# EAGLE board C-USG-CPU-10 (EAGLE 9.1.3), part 1 of 5
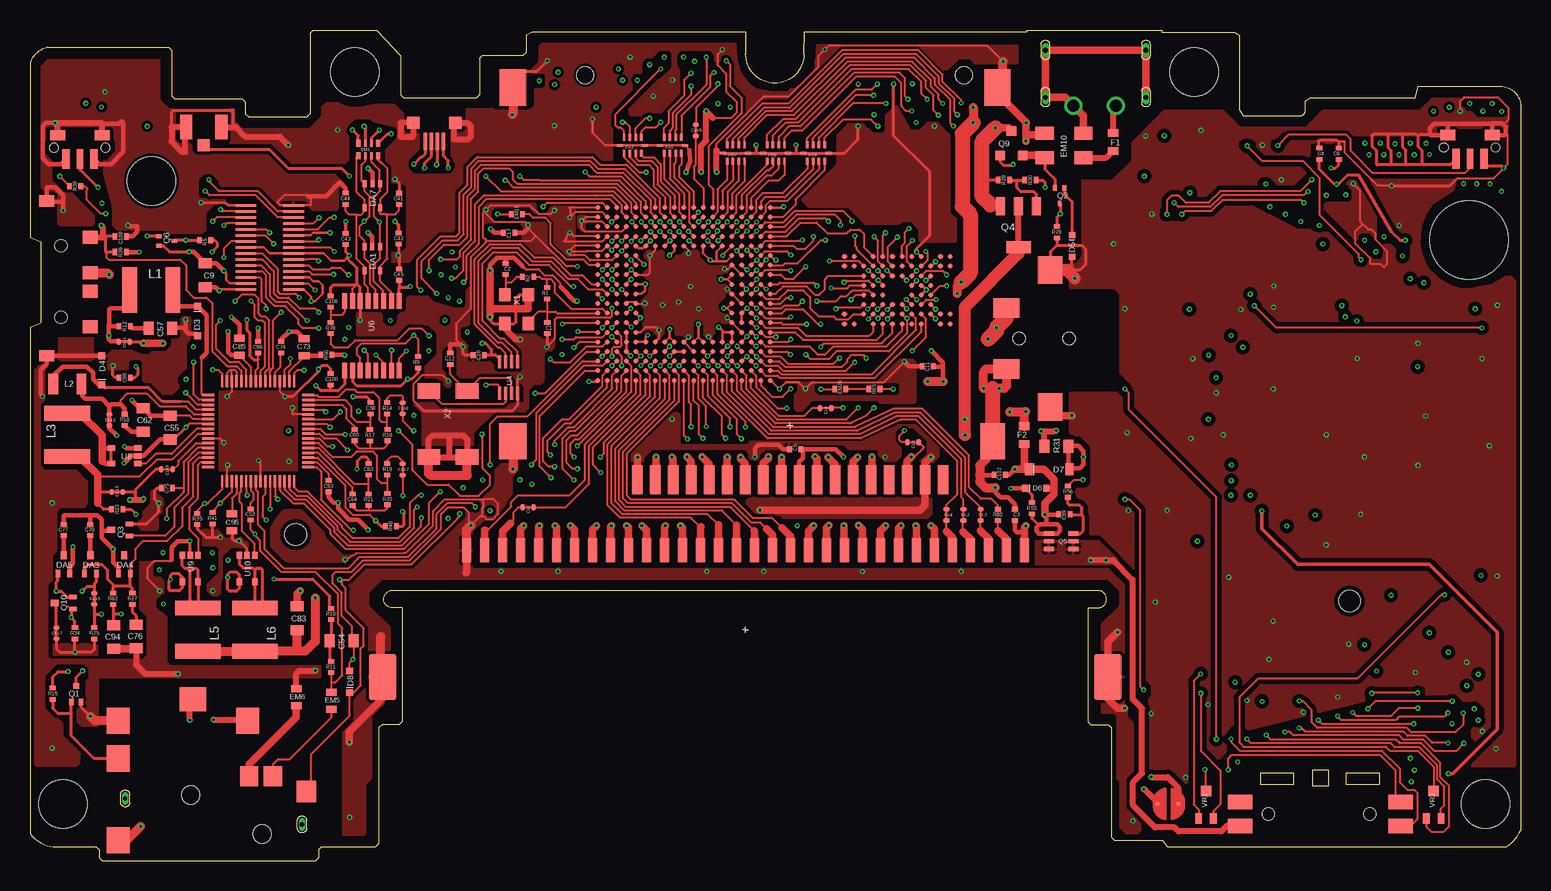
[diagram p0: board, top side]
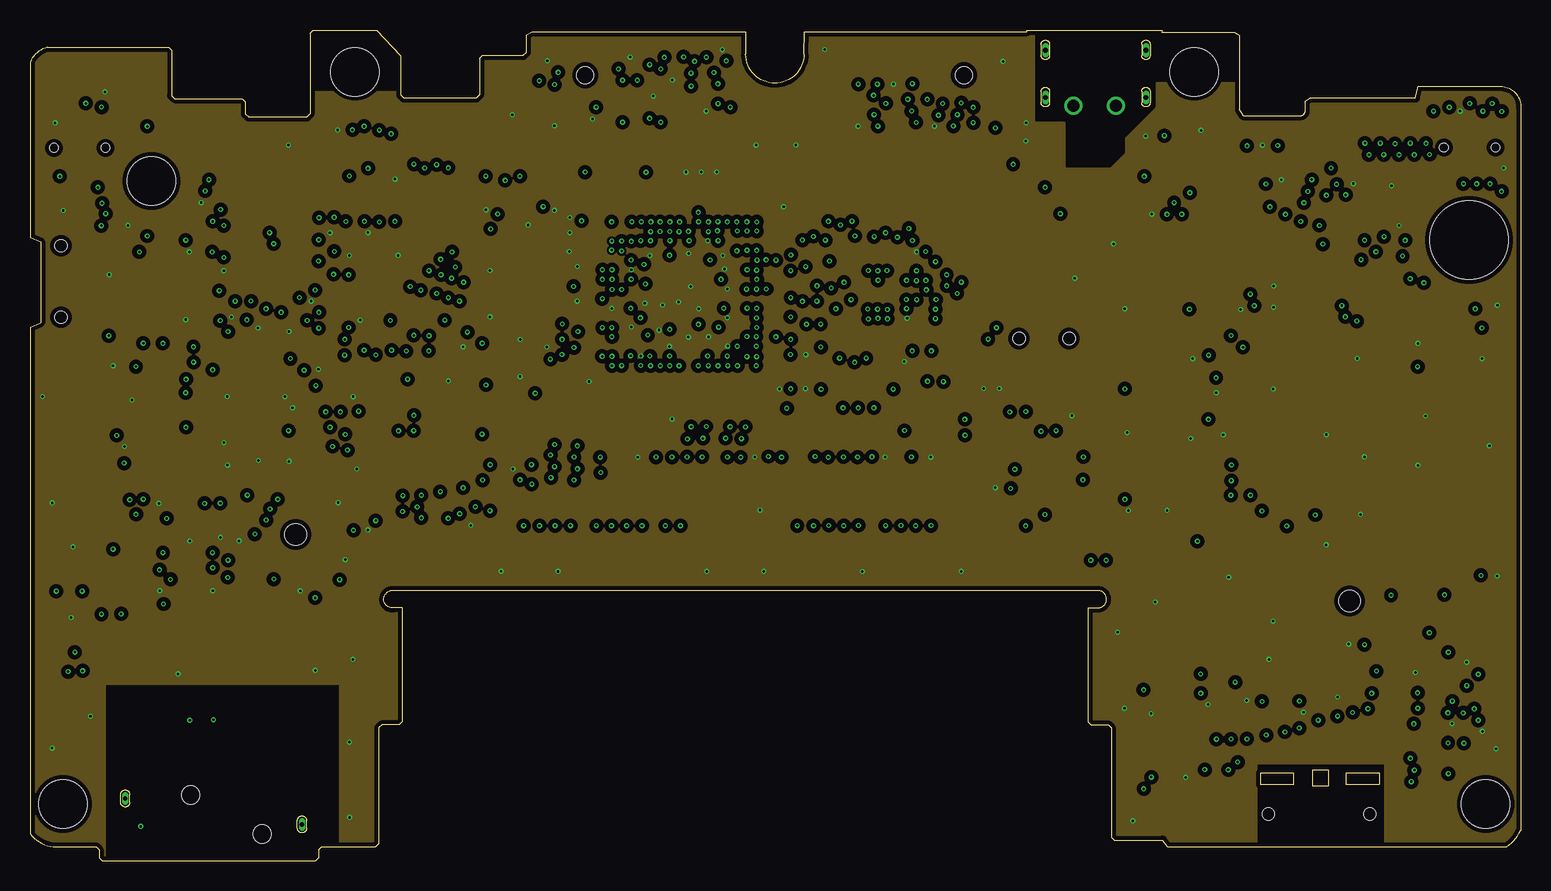
[diagram p1: board, inner layer T2]
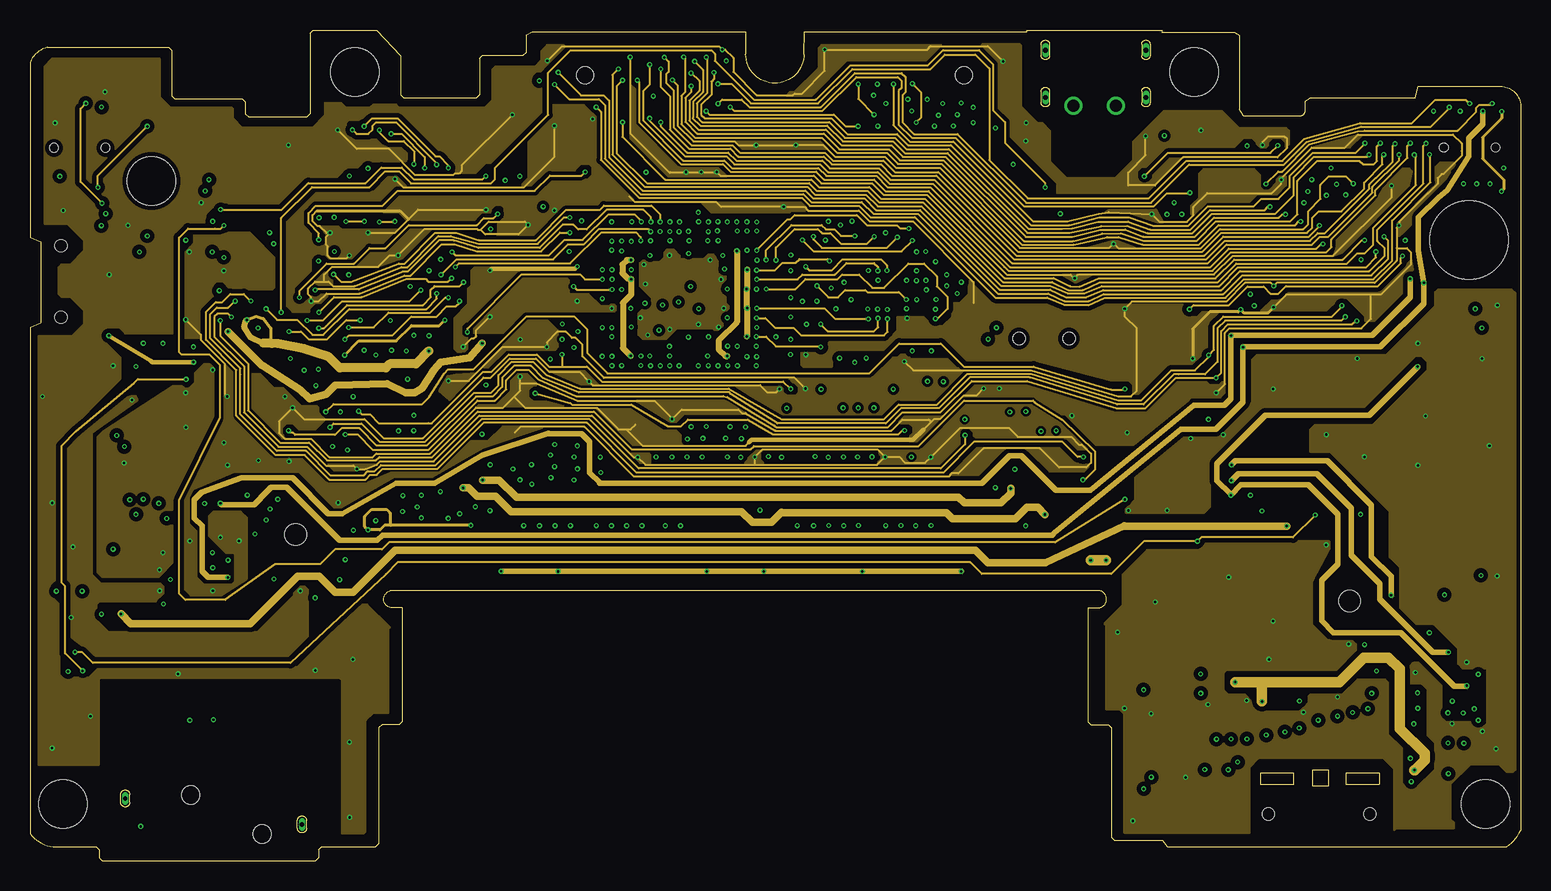
[diagram p2: board, inner layer T1]
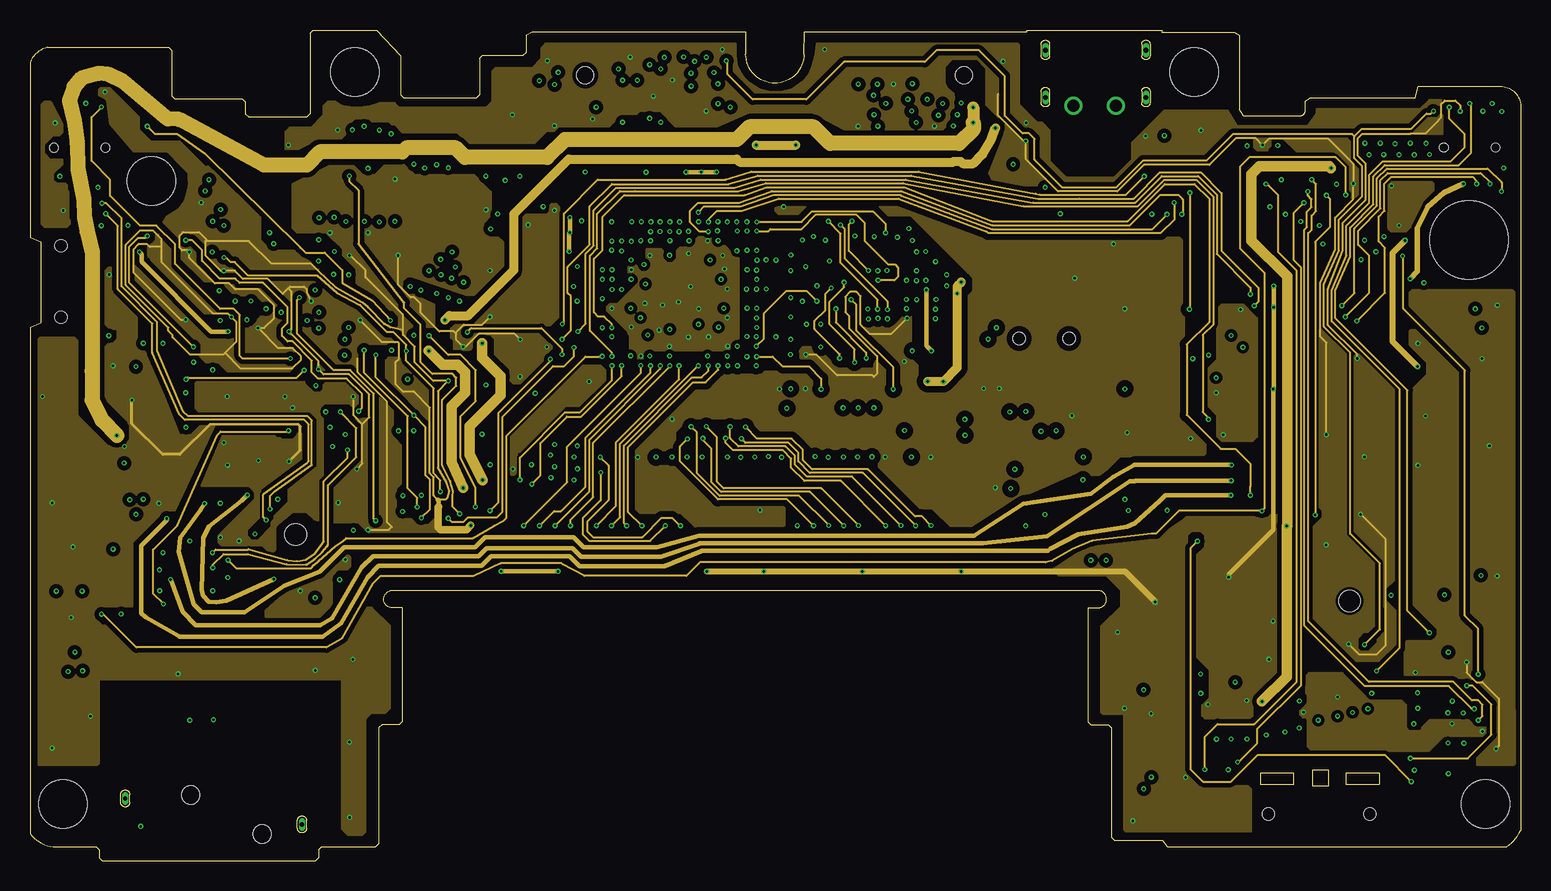
[diagram p3: board, inner layer B1]
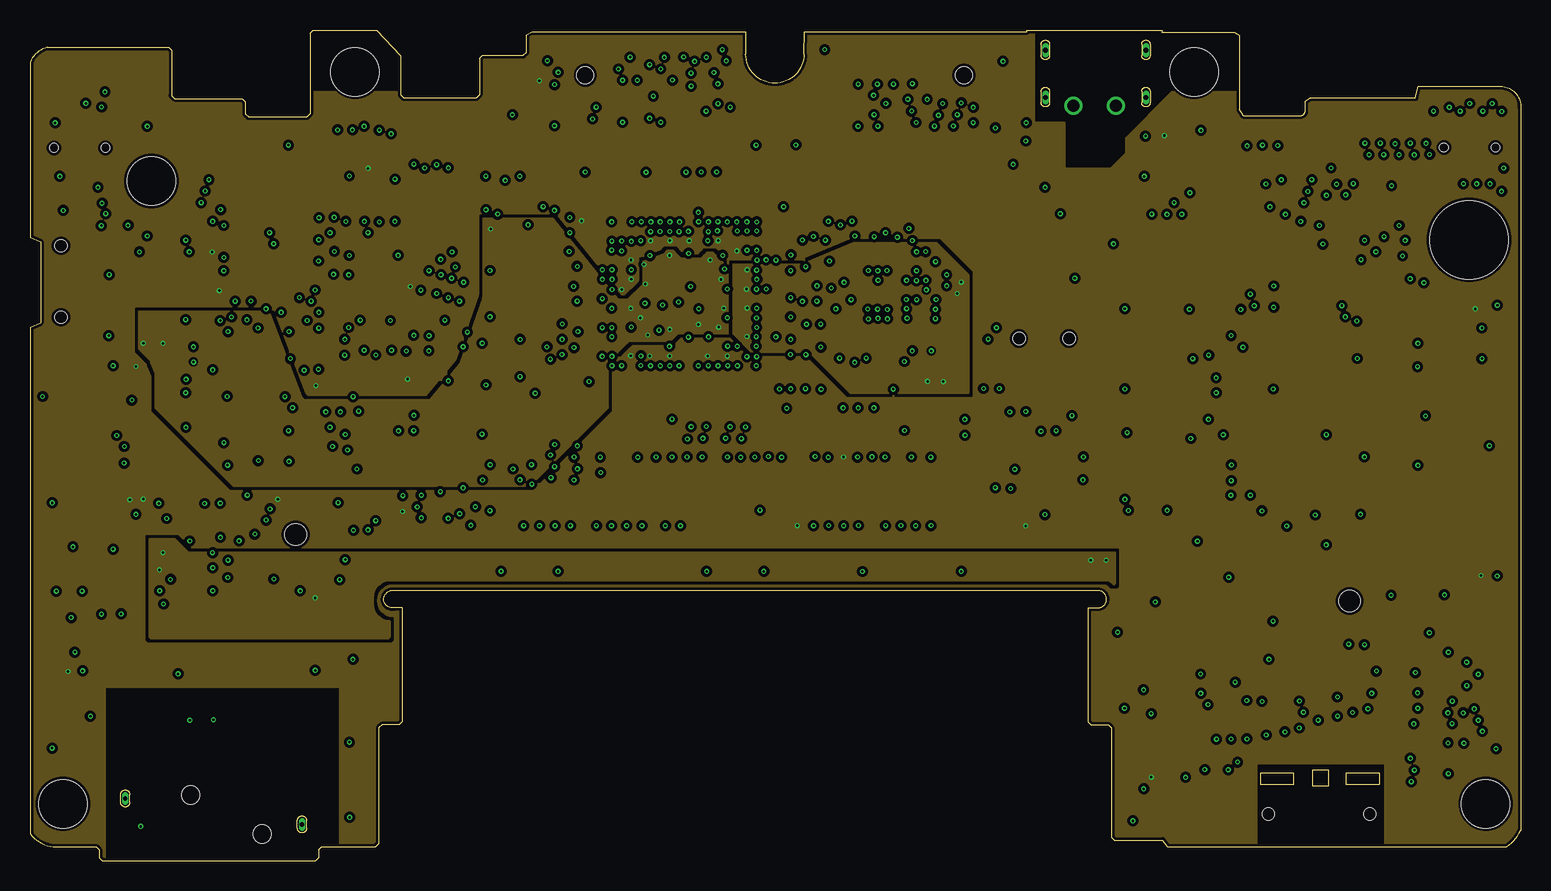
[diagram p4: board, inner layer B2]
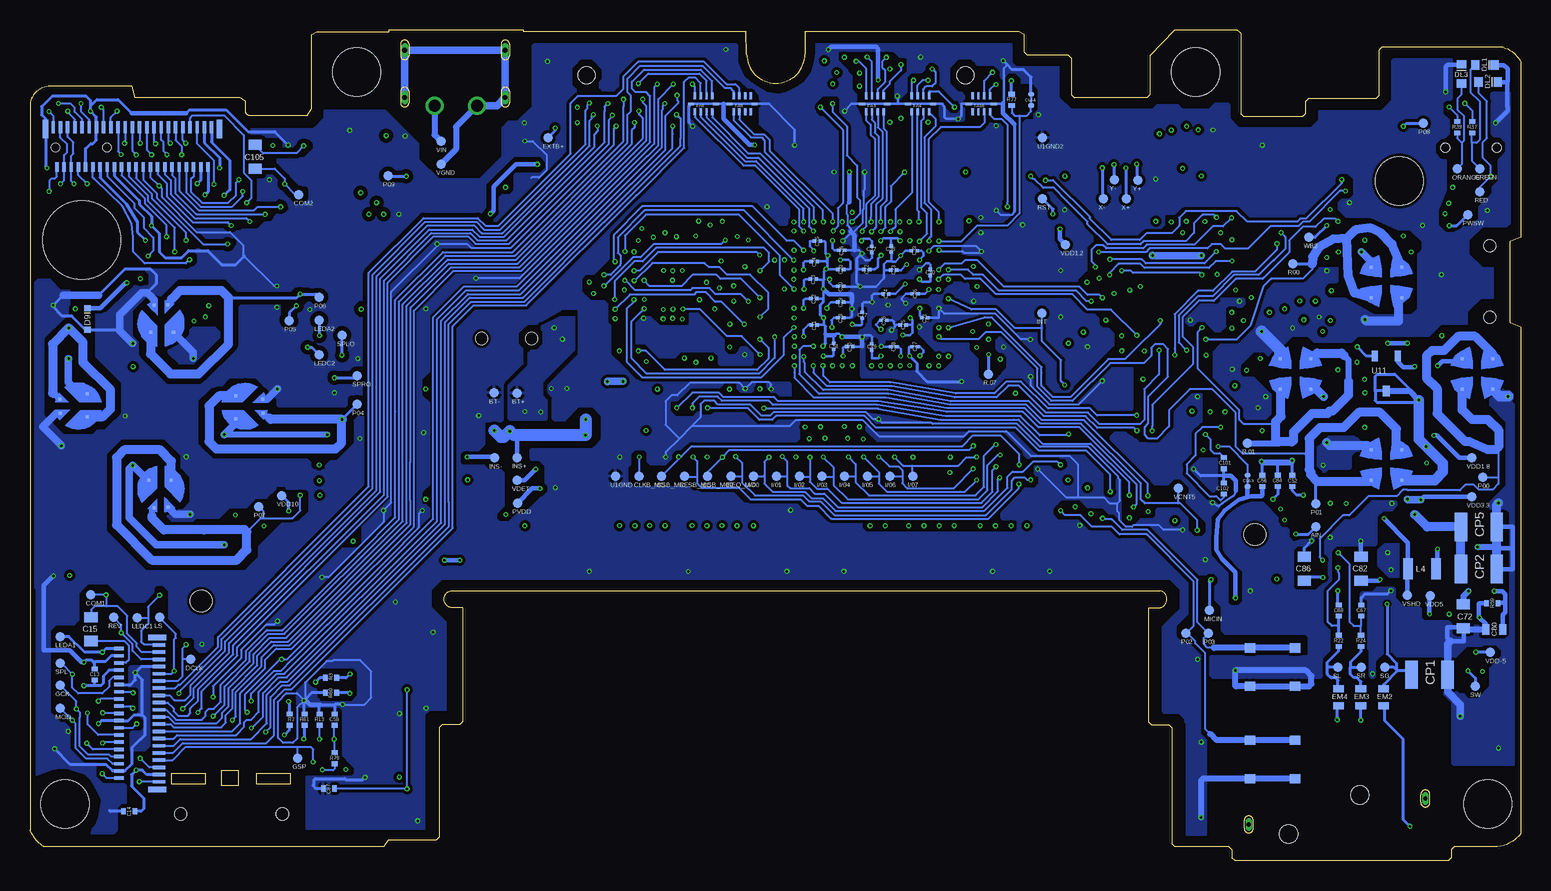
[diagram p5: board, bottom side, seen from below]

Size 124.26 x 69.22 mm. Coordinates in mm from the lower left corner, seen from the top.
Outline: 101.14,62.08 105.92,62.08 arc90 106.3,62.48 106.3,63.3 106.73,63.55 115.49,63.55 115.75,64.52 122.73,64.52 arc-90 124.26,62.74 124.26,2.54 arc-30 123.11,1.14 94.79,1.14 94.41,1.7 90.4,1.7 90.14,1.96 90.14,11.05 89.89,11.3 88.44,11.3 88.19,11.56 88.19,21.08 88.82,21.08 arc180 89.2,22.48 30.02,22.48 arc180 30.4,21.08 31.04,21.08 31.04,11.56 30.78,11.3 29.34,11.3 29.08,11.05 29.08,1.4 28.83,1.14 24.31,1.14 24.05,0.89 24.05,0.25 23.8,0 6.02,0 5.77,0.25 5.77,0.89 5.51,1.14 1.96,1.14 arc-45 0,2.23 0,44.45 0.89,44.83 0.89,51.56 0,51.94 0,66.55 arc-50 1.45,67.77 11.56,67.77 11.81,67.51 11.81,63.75 12.07,63.5 17.7,63.5 17.96,63.25 17.96,62.23 18.21,61.98 23.09,61.98 23.34,62.23 23.34,68.96 23.6,69.22 28.88,69.22 30.91,67.06 30.91,63.8 31.17,63.55 37.21,63.55 37.47,63.8 37.47,66.85 37.72,67.11 41.12,67.11 41.38,67.36 41.38,68.83 41.83,69.09 59.66,69.09 59.66,67.21 arc180 64.52,67.21 64.57,69.09 83.11,69.09 83.11,69.22 94.36,69.22 94.36,69.04 100.38,69.04 100.81,68.78 100.81,62.61 101.14,62.08
Copper layers (1*2*3+14*15*16): T3 0.035mm / dielectric 1.5mm / T2 0.035mm / dielectric 0.15mm / T1 0.035mm / dielectric 0.2mm / B1 0.035mm / dielectric 0.15mm / B2 0.035mm / dielectric 0.2mm / B3 0.035mm
Design rules "default *": minimum track width 3mil, minimum drill 0.1mm, track to track 3mil, track to pad 3mil, pad to pad 3mil, via to via 3mil, smd to smd 3mil, copper to edge 10mil, drill to drill 6mil, minimum pad ring 4mil, minimum via ring 4mil, stop-mask expansion 4mil, vias tented up to drill 0mil, thermal gap 10mil
Holes 4 mm at 10.12,56.64 27.09,65.72 2.75,4.72 97.04,65.72 121.34,4.72
Holes 6.5 mm at 119.96,51.72
Holes 1.8 mm at 22.15,27.17 109.99,21.63
Holes 1.4 mm at 46.29,65.45 77.86,65.45

## Footprints (pad centres in the part's own frame; a part is rotated, then mirrored left to right if it is on the bottom)
TP = smd 0.8 x 0.8: P$1 0,0
BUTTONSABXY = smd 0.254 x 0.254: 1 -1.27,1.27; 2 -1.27,-1.27; 3 1.27,1.27; 4 1.27,-1.27
SHOULDER_BUT = smd 0.635 x 1.651: 1 1.168,-1.27; 3 -1.168,-1.27 | smd 0.559 x 1.651: 2 0,-1.27 | smd 1.27 x 0.864: S1 -1.854,0.711; S2 1.854,0.711 | hole 0.7: -2.184,-0.33; 2.108,-0.33
0402 = smd 0.381 x 0.508: 1 -0.47,0; 2 0.47,0
0805 = smd 0.838 x 1.092: 1 -0.991,0; 2 0.991,0
0201 = smd 0.279 x 0.279: 1 -0.254,0; 2 0.254,0
0603 = smd 0.584 x 0.889: 1 -0.711,0; 2 0.711,0
CL0402 = smd 0.381 x 0.508: 1 -0.47,0; 2 0.47,0
CP = smd 1.016 x 2.362: 1 -1.499,0; 2 1.499,0
D3.4 = smd 0.584 x 0.584: A -1.219,0; C 1.219,0
D5 = smd 0.508 x 0.533: A -0.889,0; C 0.889,0
D6 = smd 0.533 x 0.584: A -0.889,0; C 0.889,0
D7 = smd 0.635 x 1.016: A -1.702,0; C 1.702,0
D8 = smd 0.533 x 0.584: A -0.889,0; C 0.889,0
DA = smd 0.584 x 0.33: 1 -1.105,0.65; 2 -1.105,0; 3 -1.105,-0.65; 4 0.889,-0.65; 5 0.889,0.65
MA3SD29F = smd 0.381 x 0.635: 1 -0.495,0; 2 0.495,0 | smd 0.508 x 0.66: 3 0,1.524
DL = smd 0.686 x 0.787: A -0.711,0; C 0.889,0
DPAD = smd 0.254 x 0.254: 1 -0.351,0.987; 2 0.81,1.026; 3 -0.635,-1.27; 4 1.27,-1.27
FILTER_NETWORK = smd 0.356 x 0.584: 1 -0.851,0.508; 2 -0.851,-0.508; 7 0.813,0.508; 8 0.813,-0.508 | smd 0.203 x 0.584: 3 -0.254,0.508; 4 -0.254,-0.508; 5 0.254,0.508; 6 0.254,-0.508
EM10 = smd 1.067 x 1.524: 1 -0.991,0; 2 -0.991,-3.226; 3 1.041,0; 4 1.041,-3.226
FUSE = smd 0.635 x 0.889: 1 -0.737,0; 2 0.737,0
FA = smd 0.203 x 0.584: 1 -0.737,0.838; 2 -0.737,-0.508; 3 -0.254,0.838; 4 -0.254,-0.508; 5 0.229,0.838; 6 0.229,-0.508; 7 0.711,0.838; 8 0.711,-0.508 | smd 0.508 x 0.203: G1 -1.067,0.152; G2 1.016,0.152
INDUCTOR = smd 1.219 x 3.81: P$1 1.803,0; P$2 -1.803,0
INDUCTOR_SMALL = smd 0.813 x 1.727: 1 -1.168,0; 2 1.168,0
GBA = smd 2.032 x 0.762: 1 -6.62,23.25; 2 -6.62,21.75; 3 -6.62,20.25; 4 -6.62,18.75; 5 -6.62,17.25; 6 -6.62,15.75; 7 -6.62,14.25; 8 -6.62,12.75; 9 -6.62,11.25; 10 -6.62,9.75; 11 -6.62,8.25; 12 -6.62,6.75; 13 -6.62,5.25; 14 -6.62,3.75; 15 -6.62,2.25; 16 -6.62,0.75; 17 -6.62,-0.75; 18 -6.62,-2.25; 19 -6.62,-3.75; 20 -6.62,-5.25; 21 -6.62,-6.75; 22 -6.62,-8.25; 23 -6.62,-9.75; 24 -6.62,-11.25; 25 -6.62,-12.75; 26 -6.62,-14.25; 27 -6.62,-15.75; 28 -6.62,-17.25; 29 -6.62,-18.75; 30 -6.62,-20.25; 31 -6.62,-21.75; 32 -6.62,-23.25 | smd 3.81 x 2.286: S1 3.937,-30.226; S2 3.937,30.226
DS = smd 0.889 x 2.413: 1 11.25,-4.5; 2 9.75,-4.5; 3 8.25,-4.5; 4 6.75,-4.5; 5 5.25,-4.5; 6 3.75,-4.5; 7 2.25,-4.5; 8 0.75,-4.5; 9 -0.75,-4.5; 10 -2.25,-4.5; 11 -3.75,-4.5; 12 -5.25,-4.5; 13 -6.75,-4.5; 14 -8.25,-4.5; 15 -9.75,-4.5; 16 -11.25,-4.5; 17 -12.75,-4.5; NC 12.75,-4.5 | smd 2.286 x 2.997: S1 -23.114,-1.27 | smd 2.032 x 2.997: S2 16.891,-1.27 | smd 2.184 x 3.023: S3 -23.114,28.194 | smd 2.159 x 3.023: S4 17.272,28.194
TOP_SCR+SPK = smd 1.016 x 0.279: 1 2.053,-11.1; 3 2.053,-10.5; 5 2.053,-9.9; 7 2.053,-9.3; 9 2.053,-8.7; 11 2.053,-8.1; 13 2.053,-7.5; 15 2.053,-6.9; 17 2.053,-6.3; 19 2.053,-5.7; 21 2.053,-5.1; 23 2.053,-4.5; 25 2.053,-3.9; 27 2.053,-3.3; 29 2.053,-2.7; 31 2.053,-2.1; 33 2.053,-1.5; 35 2.053,-0.9; 37 2.053,-0.3; 39 2.053,0.3; 41 2.053,0.9; 43 2.053,1.5; 45 2.053,2.1 | smd 0.787 x 0.279: 2 -1.27,-10.8; 4 -1.27,-10.2; 6 -1.27,-9.6; 8 -1.27,-9; 10 -1.27,-8.4; 12 -1.27,-7.8; 14 -1.27,-7.2; 16 -1.27,-6.6; 18 -1.27,-6; 20 -1.27,-5.4; 22 -1.27,-4.8; 24 -1.27,-4.2; 26 -1.27,-3.6; 28 -1.27,-3; 30 -1.27,-2.4; 32 -1.27,-1.8; 34 -1.27,-1.2; 36 -1.27,-0.6; 38 -1.27,0; 40 -1.27,0.6; 42 -1.27,1.2; 44 -1.27,1.8 | smd 1.524 x 0.457: S1 1.905,-11.735; S2 1.905,2.74
BOTTOM_SCREEN = smd 1.016 x 0.279: 1 2.053,-11.1; 3 2.053,-10.5; 5 2.053,-9.9; 7 2.053,-9.3; 9 2.053,-8.7; 11 2.053,-8.1; 13 2.053,-7.5; 15 2.053,-6.9; 17 2.053,-6.3; 19 2.053,-5.7; 21 2.053,-5.1; 23 2.053,-4.5; 25 2.053,-3.9; 27 2.053,-3.3; 29 2.053,-2.7; 31 2.053,-2.1; 33 2.053,-1.5; 35 2.053,-0.9; 37 2.053,-0.3; 39 2.053,0.3 | smd 0.787 x 0.279: 2 -1.27,-10.8; 4 -1.27,-10.2; 6 -1.27,-9.6; 8 -1.27,-9; 10 -1.27,-8.4; 12 -1.27,-7.8; 14 -1.27,-7.2; 16 -1.27,-6.6; 18 -1.27,-6; 20 -1.27,-5.4; 22 -1.27,-4.8; 24 -1.27,-4.2; 26 -1.27,-3.6; 28 -1.27,-3; 30 -1.27,-2.4; 32 -1.27,-1.8; 34 -1.27,-1.2; 36 -1.27,-0.6; 38 -1.27,0 | smd 1.524 x 0.457: S1 1.905,-11.735; S2 1.905,0.94
P6 = smd 0.3 x 1.397: 1 0.5,-1; 2 0,-1; 3 -0.5,-1; 4 -1,-1 | smd 1.016 x 1.016: S1 -2,0.533; S2 1.5,0.533
BAT = smd 2.159 x 1.651: + -3.15,2.54; - -3.15,-2.54 | smd 2.032 x 2.286: S1 0.508,5.715; S2 0.508,-5.715 | hole 1: -2.083,0; 2.083,0
HEADPHONES = smd 1.93 x 2.184: 1 -2.54,-1.27; 2 8.255,8.687; 4 -2.54,8.687; 5 -2.54,5.537 | smd 2.184 x 1.981: 3 3.683,10.49 | smd 1.524 x 1.651: 6 10.363,4.064; 8 8.382,4.064 | smd 1.626 x 1.803: 7 13.157,2.794 | drill 0.35 long: S1 -1.956,2.21; S2 12.776,0.051 | hole 1.5: 3.5,2.5; 9.45,-0.75
CHARGEPORT = drill 1: + 1.651,-3.124; - -1.905,-3.124 | drill 0.4 long: S1 -4.237,1.497; S2 4.145,1.497; S3 -4.237,-2.44; S4 4.145,-2.44
DWM--W006 = smd 1.727 x 0.203: 1 1.993,1; 2 1.993,0.5; 3 1.993,0; 4 1.993,-0.5; 5 1.993,-1; 6 1.993,-1.5; 7 1.993,-2; 8 1.993,-2.5; 9 1.993,-3; 10 1.993,-3.5; 11 1.993,-4; 12 1.993,-4.5; 13 1.993,-5; 14 1.993,-5.5; 15 1.993,-6; 16 -1.994,-6; 17 -1.994,-5.5; 18 -1.994,-5; 19 -1.994,-4.5; 20 -1.994,-4; 21 -1.994,-3.5; 22 -1.994,-3; 23 -1.994,-2.5; 24 -1.994,-2; 25 -1.994,-1.5; 26 -1.994,-1; 27 -1.994,-0.5; 28 -1.994,0; 29 -1.994,0.5; 30 -1.994,1
MIC = smd 1.016 x 2.032: G1 -1.473,0; G2 1.473,0 | smd 1.016 x 1.016: M 0,-1.524
Q1 = smd 0.381 x 0.533: 1 -0.4,-0.49; 2 0.4,-0.49 | smd 0.508 x 0.457: 3 0,0.864
SOT723 = smd 0.318 x 0.457: 1 -0.4,-0.49; 2 0.4,-0.49; 3 0,0.813
Q3.10 = smd 0.381 x 0.635: 1 -0.495,0; 2 0.495,0 | smd 0.508 x 0.66: 3 0,1.524
SOT89-3 = smd 1.524 x 0.737: 1 -2.54,1.27; 2 -2.54,-0.23; 3 -2.54,-1.73 | smd 1.016 x 2.032: P 0.864,-0.23
UF6 = smd 0.838 x 0.356: 1 -0.95,0.65; 2 -0.95,0; 3 -0.95,-0.65; 4 1.067,-0.65; 5 1.067,0; 6 1.067,0.65
TO236 = smd 0.8 x 0.8: 1 -0.95,0; 2 0.95,0; 3 0,2.02
BUTTON_SMALL = smd 0.889 x 0.762: 1 -1.88,1.6; 2 -1.88,-1.6; 3 1.88,-1.6; 4 1.88,1.6
SL1 = smd 0.254 x 0.254: P$1 -0.961,0; P$2 0.799,0
SWITCH = smd 1.219 x 1.092: 1 3.632,3.429; 2 3.632,0.457; 3 3.632,-1.067; 4 3.632,-4.013 | smd 1.27 x 0.94: S1 0,6.452; S2 0,-6.452 | hole 1: 1.194,2.718; 1.194,-3.226
CPU = smd 0.4 x 0.4: A1 -7.2,7.2; A2 -6.4,7.2; A3 -5.6,7.2; A4 -4.8,7.2; A5 -4,7.2; A6 -3.2,7.2; A7 -2.4,7.2; A8 -1.6,7.2; A9 -0.8,7.2; A10 0,7.2; A11 0.8,7.2; A12 1.6,7.2; A13 2.4,7.2; A14 3.2,7.2; A15 4,7.2; A16 4.8,7.2; A17 5.6,7.2; A18 6.4,7.2; A19 7.2,7.2; B1 -7.2,6.4; B2 -6.4,6.4; B3 -5.6,6.4; B4 -4.8,6.4; B5 -4,6.4; B6 -3.2,6.4; B7 -2.4,6.4; B8 -1.6,6.4; B9 -0.8,6.4; B10 0,6.4; B11 0.8,6.4; B12 1.6,6.4; B13 2.4,6.4; B14 3.2,6.4; B15 4,6.4; B16 4.8,6.4; B17 5.6,6.4; B18 6.4,6.4; B19 7.2,6.4; C1 -7.2,5.6; C2 -6.4,5.6; C3 -5.6,5.6; C4 -4.8,5.6; C5 -4,5.6; C6 -3.2,5.6; C7 -2.4,5.6; C8 -1.6,5.6; C9 -0.8,5.6; C10 0,5.6; C11 0.8,5.6; C12 1.6,5.6; C13 2.4,5.6; C14 3.2,5.6; C15 4,5.6; C16 4.8,5.6; C17 5.6,5.6; C18 6.4,5.6; C19 7.2,5.6; D1 -7.2,4.8; D2 -6.4,4.8; D3 -5.6,4.8; D4 -4.8,4.8; D5 -4,4.8; D6 -3.2,4.8; D7 -2.4,4.8; D8 -1.6,4.8; D9 -0.8,4.8; D10 0,4.8; D11 0.8,4.8; D12 1.6,4.8; D13 2.4,4.8; D14 3.2,4.8; D15 4,4.8; D16 4.8,4.8; D17 5.6,4.8; D18 6.4,4.8; D19 7.2,4.8; E1 -7.2,4; E2 -6.4,4; E3 -5.6,4; E4 -4.8,4; E5 -4,4; E6 -3.2,4; E7 -2.4,4; E8 -1.6,4; E9 -0.8,4; E10 0,4; E11 0.8,4; E12 1.6,4; E13 2.4,4; E14 3.2,4; E15 4,4; E16 4.8,4; E17 5.6,4; E18 6.4,4; E19 7.2,4; F1 -7.2,3.2; F2 -6.4,3.2; F3 -5.6,3.2; F4 -4.8,3.2; F5 -4,3.2; F15 4,3.2; F16 4.8,3.2; F17 5.6,3.2; F18 6.4,3.2; F19 7.2,3.2; G1 -7.2,2.4; G2 -6.4,2.4; G3 -5.6,2.4; G4 -4.8,2.4; G5 -4,2.4; G15 4,2.4; G16 4.8,2.4; G17 5.6,2.4; G18 6.4,2.4; G19 7.2,2.4; H1 -7.2,1.6; H2 -6.4,1.6; H3 -5.6,1.6; H4 -4.8,1.6; H5 -4,1.6; H15 4,1.6; H16 4.8,1.6; H17 5.6,1.6; H18 6.4,1.6; H19 7.2,1.6; I1 -7.2,0.8; I2 -6.4,0.8; I3 -5.6,0.8; I4 -4.8,0.8; I5 -4,0.8; I15 4,0.8; I16 4.8,0.8; I17 5.6,0.8; I18 6.4,0.8; I19 7.2,0.8; J1 -7.2,0; J2 -6.4,0; J3 -5.6,0; J4 -4.8,0; J5 -4,0; J15 4,0; J16 4.8,0; J17 5.6,0; J18 6.4,0; J19 7.2,0; K1 -7.2,-0.8; K2 -6.4,-0.8; K3 -5.6,-0.8; K4 -4.8,-0.8; K5 -4,-0.8; K15 4,-0.8; K16 4.8,-0.8; K17 5.6,-0.8; K18 6.4,-0.8; K19 7.2,-0.8; L1 -7.2,-1.6; L2 -6.4,-1.6; L3 -5.6,-1.6; L4 -4.8,-1.6; L5 -4,-1.6; L15 4,-1.6; L16 4.8,-1.6; L17 5.6,-1.6; L18 6.4,-1.6; L19 7.2,-1.6; M1 -7.2,-2.4; M2 -6.4,-2.4; M3 -5.6,-2.4; M4 -4.8,-2.4; M5 -4,-2.4; M15 4,-2.4; M16 4.8,-2.4; M17 5.6,-2.4; M18 6.4,-2.4; M19 7.2,-2.4; N1 -7.2,-3.2; N2 -6.4,-3.2; N3 -5.6,-3.2; N4 -4.8,-3.2; N5 -4,-3.2; N15 4,-3.2; N16 4.8,-3.2; N17 5.6,-3.2; N18 6.4,-3.2; N19 7.2,-3.2; O1 -7.2,-4; O2 -6.4,-4; O3 -5.6,-4; O4 -4.8,-4; O5 -4,-4; O6 -3.2,-4; O7 -2.4,-4; O8 -1.6,-4; O9 -0.8,-4; O10 0,-4; O11 0.8,-4; O12 1.6,-4; O13 2.4,-4; O14 3.2,-4; O15 4,-4; O16 4.8,-4; O17 5.6,-4; O18 6.4,-4; O19 7.2,-4; P1 -7.2,-4.8; P2 -6.4,-4.8; P3 -5.6,-4.8; P4 -4.8,-4.8; P5 -4,-4.8; P6 -3.2,-4.8; P7 -2.4,-4.8; P8 -1.6,-4.8; P9 -0.8,-4.8; P10 0,-4.8; P11 0.8,-4.8; P12 1.6,-4.8; P13 2.4,-4.8; P14 3.2,-4.8; P15 4,-4.8; P16 4.8,-4.8; P17 5.6,-4.8; P18 6.4,-4.8; P19 7.2,-4.8; R1 -7.2,-5.6; R2 -6.4,-5.6; R3 -5.6,-5.6; R4 -4.8,-5.6; R5 -4,-5.6; R6 -3.2,-5.6; R7 -2.4,-5.6; R8 -1.6,-5.6; R9 -0.8,-5.6; R10 0,-5.6; R11 0.8,-5.6; R12 1.6,-5.6; R13 2.4,-5.6; R14 3.2,-5.6; R15 4,-5.6; R16 4.8,-5.6; R17 5.6,-5.6; R18 6.4,-5.6; R19 7.2,-5.6; S1 -7.2,-6.4; S2 -6.4,-6.4; S3 -5.6,-6.4; S4 -4.8,-6.4; S5 -4,-6.4; S6 -3.2,-6.4; S7 -2.4,-6.4; S8 -1.6,-6.4; S9 -0.8,-6.4; S10 0,-6.4; S11 0.8,-6.4; S12 1.6,-6.4; S13 2.4,-6.4; S14 3.2,-6.4; S15 4,-6.4; S16 4.8,-6.4; S17 5.6,-6.4; S18 6.4,-6.4; S19 7.2,-6.4; T1 -7.2,-7.2; T2 -6.4,-7.2; T3 -5.6,-7.2; T4 -4.8,-7.2; T5 -4,-7.2; T6 -3.2,-7.2; T7 -2.4,-7.2; T8 -1.6,-7.2; T9 -0.8,-7.2; T10 0,-7.2; T11 0.8,-7.2; T12 1.6,-7.2; T13 2.4,-7.2; T14 3.2,-7.2; T15 4,-7.2; T16 4.8,-7.2; T17 5.6,-7.2; T18 6.4,-7.2; T19 7.2,-7.2
RAM = smd 0.4 x 0.4: A1 -4.4,-2.8; A2 -4.4,-2; A7 -4.4,2; A8 -4.4,2.8; B1 -3.6,-2.8; B7 -3.6,2; B8 -3.6,2.8; C2 -2.8,-2; C3 -2.8,-1.2; C4 -2.8,-0.4; C5 -2.8,0.4; C6 -2.8,1.2; C7 -2.8,2; D1 -2,-2.8; D2 -2,-2; D3 -2,-1.2; D4 -2,-0.4; D5 -2,0.4; D6 -2,1.2; D7 -2,2; D8 -2,2.8; E1 -1.2,-2.8; E2 -1.2,-2; E3 -1.2,-1.2; E4 -1.2,-0.4; E5 -1.2,0.4; E6 -1.2,1.2; E7 -1.2,2; E8 -1.2,2.8; F1 -0.4,-2.8; F2 -0.4,-2; F3 -0.4,-1.2; F6 -0.4,1.2; F7 -0.4,2; F8 -0.4,2.8; G1 0.4,-2.8; G2 0.4,-2; G3 0.4,-1.2; G6 0.4,1.2; G7 0.4,2; G8 0.4,2.8; H1 1.2,-2.8; H2 1.2,-2; H3 1.2,-1.2; H4 1.2,-0.4; H5 1.2,0.4; H6 1.2,1.2; H7 1.2,2; H8 1.2,2.8; J1 2,-2.8; J2 2,-2; J3 2,-1.2; J4 2,-0.4; J5 2,0.4; J6 2,1.2; J7 2,2; J8 2,2.8; K2 2.8,-2; K3 2.8,-1.2; K4 2.8,-0.4; K5 2.8,0.4; K6 2.8,1.2; K7 2.8,2; L1 3.6,-2.8; L2 3.6,-2; L7 3.6,2; L8 3.6,2.8; M1 4.4,-2.8; M2 4.4,-2; M7 4.4,2; M8 4.4,2.8
MITSUMI_3325A = smd 0.203 x 1.016: 1 3,4.166; 2 2.6,4.166; 3 2.2,4.166; 4 1.8,4.166; 5 1.4,4.166; 6 1,4.166; 7 0.6,4.166; 8 0.2,4.166; 9 -0.2,4.166; 10 -0.6,4.166; 11 -1,4.166; 12 -1.4,4.166; 13 -1.8,4.166; 14 -2.2,4.166; 15 -2.6,4.166; 16 -3,4.166; 33 -3,-4.166; 34 -2.6,-4.166; 35 -2.2,-4.166; 36 -1.8,-4.166; 37 -1.4,-4.166; 38 -1,-4.166; 39 -0.6,-4.166; 40 -0.2,-4.166; 41 0.2,-4.166; 42 0.6,-4.166; 43 1,-4.166; 44 1.4,-4.166; 45 1.8,-4.166; 46 2.2,-4.166; 47 2.6,-4.166; 48 3,-4.166 | smd 1.016 x 0.203: 17 -4.166,3; 18 -4.166,2.6; 19 -4.166,2.2; 20 -4.166,1.8; 21 -4.166,1.4; 22 -4.166,1; 23 -4.166,0.6; 24 -4.166,0.2; 25 -4.166,-0.2; 26 -4.166,-0.6; 27 -4.166,-1; 28 -4.166,-1.4; 29 -4.166,-1.8; 30 -4.166,-2.2; 31 -4.166,-2.6; 32 -4.166,-3; 49 4.166,-3; 50 4.166,-2.6; 51 4.166,-2.2; 52 4.166,-1.8; 53 4.166,-1.4; 54 4.166,-1; 55 4.166,-0.6; 56 4.166,-0.2; 57 4.166,0.2; 58 4.166,0.6; 59 4.166,1; 60 4.166,1.4; 61 4.166,1.8; 62 4.166,2.2; 63 4.166,2.6; 64 4.166,3
TSSOP8 = smd 1.092 x 0.279: 1 -1.95,1; 2 -1.95,0.5; 3 -1.95,0; 4 -1.95,-0.5; 5 0.66,-0.5; 6 0.66,0; 7 0.66,0.5; 8 0.66,1
TSSOP16 = smd 1.27 x 0.406: 1 -2.9,2.31; 2 -2.9,1.66; 3 -2.9,1.01; 4 -2.9,0.36; 5 -2.9,-0.29; 6 -2.9,-0.94; 7 -2.9,-1.59; 8 -2.9,-2.24; 9 2.9,-2.24; 10 2.9,-1.59; 11 2.9,-0.94; 12 2.9,-0.29; 13 2.9,0.36; 14 2.9,1.01; 15 2.9,1.66; 16 2.9,2.31
SOT-353F___(UFV)-M = smd 0.61 x 0.457: 1 -1.105,0.65; 2 -1.105,0; 3 -1.105,-0.65; 4 1.105,-0.65; 5 1.105,0.65
EM6781 = smd 0.889 x 0.508: 1 -1.575,0.965; 2 -1.575,-0.965 | smd 0.889 x 0.559: 3 1.321,0
VR = smd 0.889 x 0.559: 1 -1.575,0.61; 3 -1.575,-0.61 | smd 0.889 x 0.889: 2 0.711,0
VOLUME = smd 2.032 x 1.219: 1 10.922,-1.981; 2 10.922,0; 3 -2.464,-1.981; 4 -2.464,0 | hole 1: -0.1,-1; 8.37,-1
X1 = smd 1.118 x 0.94: 1 -1.245,-0.94; 2 1.168,-0.94; 3 1.168,1.016; 4 -1.245,1.016
X2 = smd 1.3 x 1.9: 1 -1.3,-1.9; 2 4.2,-1.9; 3 4.2,1.3; 4 -1.3,1.3

## Placement (x,y rotation side)
AIN  TP  [TP]  17.09,27.84 0 bottom
BT+  TP  [TP]  83.66,38.96 0 bottom
BT-  TP  [TP]  85.58,38.97 0 bottom
BUT_A  BUT_ABXY  [BUTTONSABXY]  3.61,40.54 0 bottom
BUT_B  BUT_ABXY  [BUTTONSABXY]  11.18,32.97 0 bottom
BUT_L  SHOULDER_BUT  [SHOULDER_BUT]  120.04,59.75 0 top
BUT_R  SHOULDER_BUT  [SHOULDER_BUT]  4.17,59.73 0 top
BUT_X  BUT_ABXY  [BUTTONSABXY]  11.18,48.18 0 bottom
BUT_Y  BUT_ABXY  [BUTTONSABXY]  18.75,40.54 0 bottom
C1  C0402  [0402]  43.13,44.38 90 top
C2  C0402  [0402]  39.66,49.3 90 top
C3  C0402  [0402]  82.11,28.81 90 top
C4  C0402  [0402]  107.48,58.9 90 top
C5  C0402  [0402]  63.78,34.28 180 top
C6  C0402  [0402]  109.09,58.9 270 top
C9  C0805  [0805]  14.61,48.78 90 top
C10  C0402  [0402]  37.4,42.11 180 top
C11  C0402  [0402]  74.83,41.21 0 top
C12  C0402  [0402]  35.04,41.81 270 top
C13  C0402  [0402]  118.88,15.51 90 bottom
C14  C0402  [0402]  115.99,4.1 180 bottom
C15  C0805  [0805]  119.17,19.29 270 bottom
C17  C0402  [0402]  39.94,52.3 0 top
C20  C0201  [0201]  56.67,49.26 180 bottom
C21  C0201  [0201]  49.68,45.24 0 bottom
C22  C0201  [0201]  54.51,49.26 180 bottom
C23  C0201  [0201]  52.27,49.21 180 bottom
C24  C0201  [0201]  52.91,47.22 180 bottom
C25  C0201  [0201]  51.47,44.64 180 bottom
C26  C0201  [0201]  53.08,45.03 0 bottom
C27  C0201  [0201]  54.89,45.45 90 bottom
C28  C0201  [0201]  56.67,45.23 0 bottom
C29  C0201  [0201]  56.67,46.54 0 bottom
C30  C0201  [0201]  56.67,47.86 0 bottom
C31  C0201  [0201]  58.88,44.64 0 bottom
C32  C0201  [0201]  58.91,46.84 0 bottom
C33  C0201  [0201]  58.95,48.45 0 bottom
C34  C0201  [0201]  58.87,49.93 0 bottom
C35  C0201  [0201]  58.62,51.63 0 bottom
C36  C0201  [0201]  56.6,50.86 0 bottom
C37  C0201  [0201]  54.09,50.94 270 bottom
C38  C0201  [0201]  52.48,50.95 270 bottom
C39  C0201  [0201]  50.53,50.82 180 bottom
C40  C0201  [0201]  49.22,49 90 bottom
C41  C0402  [0402]  30.76,55.14 270 top
C42  C0402  [0402]  30.73,51.84 90 top
C43  C0402  [0402]  26.32,51.8 90 top
C44  C0402  [0402]  26.32,55.14 270 top
C45  C0402  [0402]  30.76,48.83 270 top
C46  C0201  [0201]  50.49,47.23 180 bottom
C47  C0201  [0201]  50.49,42.82 180 bottom
C48  C0201  [0201]  52.27,42.82 180 bottom
C49  C0201  [0201]  54.09,42.81 90 bottom
C50  C0201  [0201]  55.91,42.83 0 bottom
C51  C0201  [0201]  57.26,42.86 90 bottom
C52  C0402  [0402]  19.03,31.64 90 bottom
C53  C0402  [0402]  18.4,28.84 270 top
C54  C0805  [0805]  25.99,18.33 0 top
C55  C0805  [0805]  11.7,36.08 90 top
C56  C0402  [0402]  21.52,31.64 270 bottom
C57  C0805  [0805]  10.88,44.37 0 top
C58  C0402  [0402]  28.39,37.69 90 top
C59  C0402  [0402]  98.85,11.75 270 bottom
C60  C0402  [0402]  27.07,35.46 270 top
C62  C0805  [0805]  9.44,36.72 90 top
C63  C0402  [0402]  28.22,32.61 90 top
C64  C0402  [0402]  26.9,30.07 270 top
C67  C0402  [0402]  13.29,20.85 90 bottom
C68  C0402  [0402]  15.16,20.85 90 bottom
C70  C0402  [0402]  5.02,27.55 270 top
C72  C0805  [0805]  4.77,20.35 90 bottom
C73  C0603  [0603]  22.85,42.79 270 top
C74  C0402  [0402]  20.95,42.77 270 top
C75  C0402  [0402]  11.42,31.05 0 top
C76  C0805  [0805]  8.85,18.68 270 top
C77  C0402  [0402]  2.82,27.55 270 top
C80  C0603  [0603]  2.21,19.24 180 bottom
C82  C0805  [0805]  13.31,24.33 270 bottom
C83  C0805  [0805]  22.28,20.2 90 top
C84  C0402  [0402]  20.23,31.64 270 bottom
C85  C0603  [0603]  17.46,42.8 270 top
C86  C0805  [0805]  18.04,24.32 270 bottom
C88  C0402  [0402]  7.9,40.24 180 top
C93  C0402  [0402]  24.88,31.21 90 top
C94  C0805  [0805]  6.97,18.63 270 top
C95  C0603  [0603]  16.84,28.2 90 top
C96  C0402  [0402]  19.03,42.77 270 top
C97  C0402  [0402]  99.35,6 0 bottom
C99  C0402  [0402]  86.22,28.86 0 top
C100  C0402  [0402]  25.06,40.11 270 top
C101  C0402  [0402]  24.73,33.12 270 bottom
C102  C0402  [0402]  24.73,31.01 90 bottom
C105  C0805  [0805]  105.49,58.64 90 bottom
C106  C0402  [0402]  25.05,46.59 270 top
C107  C0402  [0402]  80.84,32.15 0 top
C108  C0402  [0402]  7.56,52.01 180 top
CL2  CL  [CL0402]  79.25,28.81 90 top
CL3  CL  [CL0402]  77.81,28.81 90 top
CL4  CL  [CL0402]  76.4,28.81 90 top
CL5  CL  [CL0402]  73.62,34.87 0 top
CL6  CL  [CL0402]  41.52,29.45 0 top
CL9  CL  [CL0402]  66.33,37.7 0 top
CL11  CL  [CL0402]  7.86,43.24 0 top
CL12  CL  [CL0402]  6.62,36.72 90 top
CL13  CL  [CL0402]  7.27,30.72 180 top
CL15  CL  [CL0402]  5.36,21.82 90 top
CL17  CL  [CL0402]  2.2,18.94 90 top
CL60  CL  [CL0402]  11.42,32.61 0 top
CL63  CL  [CL0402]  22.77,31.64 90 bottom
CL64  CL  [CL0402]  40.81,63.39 270 bottom
CL65  CL  [CL0402]  55.49,60.86 90 top
CL67  CL  [CL0402]  31.06,32.59 90 top
CL68  CL  [CL0402]  31.06,37.69 90 top
CLKB_MC  TP  [TP]  73.5,32.02 0 bottom
COM1  TP  [TP]  119.19,22.16 0 bottom
COM2  TP  [TP]  101.86,55.49 0 bottom
CP1  CP  [CP]  7.59,15.48 180 bottom
CP2  CP  [CP]  3.48,24.29 180 bottom
CP5  CP  [CP]  3.48,27.81 180 bottom
CSB_MC  TP  [TP]  71.61,32.02 0 bottom
CSB_MC2  TP  [TP]  67.8,32.02 0 bottom
D3  D3.4  [D3.4]  13.97,44.97 90 top
D4  D3.4  [D3.4]  5.98,40.87 270 top
D5  D5  [D5]  86.87,51.21 90 top
D6  D6  [D6]  83.84,31.04 180 top
D7  D7  [D7]  84.94,32.62 180 top
D8  D8  [D8]  26.66,14.91 270 top
D9  D5  [D5]  119.48,45.13 90 bottom
DA1  MA5J002D  [DA]  28.54,50.04 270 top
DA3  MA3SD29F  [MA3SD29F]  5.04,23.91 0 top
DA4  MA3SD29F  [MA3SD29F]  7.87,23.91 0 top
DA5  MA3SD29F  [MA3SD29F]  2.82,23.91 0 top
DA7  MA5J002E  [DA]  28.55,55.29 270 top
DCLK  TP  [TP]  110.88,16.76 0 bottom
DL1  DL  [DL]  3.06,66.29 0 bottom
DL2  DL  [DL]  2.8,64.87 0 bottom
DL3  DL  [DL]  4.94,65.47 90 bottom
DOWN  DPAD  [DPAD]  113.11,30.44 180 bottom
EM1  FILTER_NETWORK  [FILTER_NETWORK]  28.22,59.26 0 top
EM2  FILTER0603  [0603]  11.42,13.62 270 bottom
EM3  FILTER0603  [0603]  13.32,13.62 270 bottom
EM4  FILTER0603  [0603]  15.18,13.62 270 bottom
EM5  FILTER0603  [0603]  25.14,13.33 270 top
EM6  FILTER0603  [0603]  22.2,13.62 270 top
EM10  EM10  [EM10]  84.59,59.57 90 top
EM11  FILTER  [0402]  40.59,53.87 0 top
EM26  FILTER  [0402]  67.54,39.3 0 top
EXTB+  TP  [TP]  81.09,60.23 0 bottom
F1  FUSE  [FUSE]  90.29,59.88 90 top
F2  FUSE  [FUSE]  82.88,35.46 270 top
FA1  FA  [FA]  53.6,59.44 0 top
FA2  FA  [FA]  50.26,59.44 0 top
FA3  FA  [FA]  53.82,62.9 0 bottom
FA4  FA  [FA]  50.01,62.9 0 bottom
FA5  FA  [FA]  65.54,58.8 0 top
FA6  FA  [FA]  62.19,58.8 0 top
FA7  FA  [FA]  58.85,58.8 0 top
FA8  FA  [FA]  68.09,62.9 0 bottom
FA9  FA  [FA]  64.87,62.9 0 bottom
FA10  FA  [FA]  44.94,62.9 0 bottom
GCK  TP  [TP]  121.73,14.6 0 bottom
GREEN  TP  [TP]  3.4,57.65 0 bottom
GSP  TP  [TP]  101.97,8.54 0 bottom
I/00  TP  [TP]  63.95,32.02 0 bottom
I/01  TP  [TP]  62.05,32.02 0 bottom
I/02  TP  [TP]  60.13,32.02 0 bottom
I/03  TP  [TP]  58.24,32.02 0 bottom
I/04  TP  [TP]  56.37,32.02 0 bottom
I/05  TP  [TP]  54.47,32.02 0 bottom
I/06  TP  [TP]  52.56,32.02 0 bottom
I/07  TP  [TP]  50.68,32.02 0 bottom
INS+  TP  [TP]  83.66,33.59 0 bottom
INS-  TP  [TP]  85.55,33.55 0 bottom
INT  TP  [TP]  39.91,45.62 0 bottom
IREQ_MC  TP  [TP]  65.84,32.02 0 bottom
L1  INDUCTOR  [INDUCTOR]  10.12,47.55 180 top
L2  INDUCTOR_SMALL  [INDUCTOR_SMALL]  3.12,39.72 180 top
L3  INDUCTOR  [INDUCTOR]  3.11,35.47 270 top
L4  INDUCTOR_SMALL  [INDUCTOR_SMALL]  8.22,24.33 0 bottom
L5  INDUCTOR  [INDUCTOR]  14,19.25 90 top
L6  INDUCTOR  [INDUCTOR]  18.75,19.25 90 top
LEDA1  TP  [TP]  121.73,18.67 0 bottom
LEDA2  TP  [TP]  100.14,45.03 0 bottom
LEDC1  TP  [TP]  115.34,20.25 0 bottom
LEDC2  TP  [TP]  100.16,42.15 0 bottom
LEFT  DPAD  [DPAD]  120.75,37.63 90 bottom
LS  TP  [TP]  113.47,20.27 0 bottom
MICIN  TP  [TP]  25.96,20.84 0 bottom
MOD  TP  [TP]  121.73,12.68 0 bottom
ORANGE  TP  [TP]  5.3,57.64 0 bottom
P00  TP  [TP]  3.15,31.94 0 bottom
P01  TP  [TP]  17.07,29.74 0 bottom
P02  TP  [TP]  27.89,18.95 0 bottom
P03  TP  [TP]  26.02,18.94 0 bottom
P04  TP  [TP]  96.99,38.01 0 bottom
P05  TP  [TP]  102.65,44.99 0 bottom
P06  TP  [TP]  100.15,46.93 0 bottom
P07  TP  [TP]  105.18,29.49 0 bottom
P08  TP  [TP]  8.11,61.44 0 bottom
P09  TP  [TP]  94.42,57.05 0 bottom
P.1  GBASLOT  [GBA]  59.64,19.24 270 top
P.2  DSSLOT  [DS]  63.37,36.23 0 top
P.3  TOP_SCR+SPK  [TOP_SCR+SPK]  120.22,59.06 90 bottom
P.4  BOTTOM_SCREEN  [BOTTOM_SCREEN]  115.56,17.67 0 bottom
P.6  TOUCH  [P6]  33.96,60.94 0 top
P.7  BAT  [BAT]  84.53,43.51 0 top
P.8  HEADPHONES  [HEADPHONES]  9.89,2.96 0 top
P.9  CHARGEPORT  [CHARGEPORT]  88.88,66.04 0 top
P.10  DWM-W006  [DWM--W006]  19.99,53.61 0 top
P.12  MIC  [MIC]  14.48,61.13 0 top
PVDD  TP  [TP]  83.63,29.79 0 bottom
PWSW  TP  [TP]  4.41,53.83 0 bottom
Q1  Q1  [Q1]  3.85,13.69 0 top
Q2  DTA143ZM  [SOT723]  85.84,55.57 180 top
Q3  SSM3K16FS  [Q3.10]  8.3,27.55 90 top
Q4  2SA2069  [SOT89-3]  82.64,51.98 270 top
Q5  SSM6J21TU  [UF6]  86.01,26.61 180 top
Q6  2SC4244  [SOT723]  11.22,51.64 270 top
Q9  SSM3J14T  [TO236]  81.82,58.77 0 top
Q10  SSM3K16FS  [Q3.10]  3.57,21.47 90 top
R00  TP  [TP]  18.98,49.74 0 bottom
R1  R0402  [0402]  43.09,47.28 270 top
R2  R0402  [0402]  41.52,48.65 0 top
R3  R0402  [0402]  99.17,15.22 180 bottom
R5  R0402  [0402]  14.59,51.68 0 top
R7  R0402  [0402]  102.63,11.75 90 bottom
R9  R0402  [0402]  32.34,41.52 270 top
R10  R0402  [0402]  25.09,20.55 270 top
R11  R0402  [0402]  25.1,16.13 270 top
R12  R0402  [0402]  7.9,44.52 0 top
R13  R0402  [0402]  100.12,11.75 270 bottom
R14  R0402  [0402]  29.78,37.69 90 top
R15  R0402  [0402]  1.89,13.91 90 top
R16  R0402  [0402]  29.81,35.45 90 top
R17  R0402  [0402]  28.34,35.45 270 top
R18  R0402  [0402]  7.9,36.72 270 top
R19  R0402  [0402]  29.78,32.61 90 top
R20  R0402  [0402]  29.79,30.12 90 top
R21  R0402  [0402]  28.23,30.07 270 top
R22  R0402  [0402]  15.16,18.31 270 bottom
R23  R0402  [0402]  7.27,29.27 180 top
R24  R0402  [0402]  13.3,18.31 270 bottom
R25  R0402  [0402]  5.36,18.94 270 top
R27  R0402  [0402]  8.54,21.82 270 top
R28  R0402  [0402]  81.19,56.71 0 top
R29  R0402  [0402]  85.59,52.36 270 top
R30  R0402  [0402]  83.4,56.71 180 top
R31  R0805  [0805]  85.56,34.52 180 top
R34  R0402  [0402]  3.75,18.94 90 top
R35  R0402  [0402]  13.95,28.47 270 top
R36  R0402  [0402]  7.56,50.71 180 top
R37  R0402  [0402]  4.03,61.11 270 bottom
R38  R0402  [0402]  3.76,56.21 180 top
R39  R0402  [0402]  5.29,61.11 270 bottom
R40  R0402  [0402]  30.09,27.87 0 top
R41  R0402  [0402]  15.22,28.53 90 top
R50  R0402  [0402]  24.71,42.14 180 top
R55  R0402  [0402]  83.51,29.36 270 top
R56  R0402  [0402]  86.52,30.75 90 top
R59  R0402  [0402]  2.36,21.46 180 bottom
R60  R0402  [0402]  99.17,13.98 0 bottom
R61  R0402  [0402]  101.37,11.75 270 bottom
R62  R0402  [0402]  6.93,21.82 270 top
R65  R0402  [0402]  70.39,39.3 0 top
R77  R0402  [0402]  42.43,63.39 270 bottom
R78  R0402  [0402]  25.05,44.38 90 top
R79  R0402  [0402]  98.86,8.54 270 bottom
R80  R0402  [0402]  80.68,28.81 270 top
R.01  TP  [TP]  22.8,34.78 0 bottom
R.07  TP  [TP]  44.36,40.54 0 bottom
RED  TP  [TP]  3.4,55.74 0 bottom
RESB_MC  TP  [TP]  69.7,32.02 0 bottom
REV  TP  [TP]  117.3,20.26 0 bottom
RIGHT  DPAD  [DPAD]  105.84,38.1 270 bottom
RST  TP  [TP]  39.85,55.15 0 bottom
SELECT  BUTTON_SMALL  [BUTTON_SMALL]  20.68,8.43 0 bottom
SG  TP  [TP]  11.31,16.1 0 bottom
SL  TP  [TP]  15.22,16.1 0 bottom
SL1  SL1  [SL1]  94.93,4.72 0 top
SPL  TP  [TP]  121.73,16.44 0 bottom
SPLO  TP  [TP]  98.26,43.76 0 bottom
SPRO  TP  [TP]  96.98,40.42 0 bottom
SR  TP  [TP]  13.26,16.11 0 bottom
START  BUTTON_SMALL  [BUTTON_SMALL]  20.68,16.12 0 bottom
SW  TP  [TP]  3.78,14.52 0 bottom
SW13  SWITCH  [SWITCH]  1.39,48.51 0 top
U1  NTR_CPU_B  [CPU]  54.52,47.22 270 top
U1GND  TP  [TP]  75.46,32.02 0 bottom
U1GND2  TP  [TP]  39.86,60.23 0 bottom
U2  82DBS02163C-70L  [RAM]  72.3,47.53 0 top
U3  MITSUMI_3325A  [MITSUMI_3325A]  19.02,35.78 0 top
U4  RTC  [TSSOP8]  40.14,40.9 90 top
U6  TSC2046  [TSSOP16]  28.47,43.73 270 top
U8  SSM5G04TU  [SOT-353F___(UFV)-M]  7.89,33.72 180 top
U9  SSM5H08TU  [SOT-353F___(UFV)-M]  13.36,24.35 270 top
U10  SSM5H08TU  [SOT-353F___(UFV)-M]  18.09,24.35 270 top
U11  EM6781  [EM6781]  11.21,40.46 270 bottom
UP  DPAD  [DPAD]  113.57,45.28 0 bottom
VCNT5  TP  [TP]  28.51,31.02 0 bottom
VDD1.2  TP  [TP]  37.95,51.33 0 bottom
VDD1.8  TP  [TP]  4.08,33.56 0 bottom
VDD3.3  TP  [TP]  4.08,30.33 0 bottom
VDD5  TP  [TP]  7.55,22.08 0 bottom
VDD10  TP  [TP]  103.27,30.42 0 bottom
VDD-5  TP  [TP]  2.52,17.35 0 bottom
VDET  TP  [TP]  83.67,31.7 0 bottom
VGND  TP  [TP]  89.98,58.04 0 bottom
VIN  TP  [TP]  89.99,59.93 0 bottom
VR1  VR  [VR]  98.03,5.08 90 top
VR2  VR  [VR]  117.01,5.08 90 top
VR3  VOLUME  [VOLUME]  103.33,4.87 0 top
VSHD  TP  [TP]  9.45,22.12 0 bottom
WB2  TP  [TP]  17.67,51.93 0 bottom
X1  X1  [X1]  40.52,45.91 270 top
X2  X2  [X2]  35.15,37.83 270 top
X+  TP  [TP]  32.86,55.14 0 bottom
X-  TP  [TP]  34.77,55.15 0 bottom
Y+  TP  [TP]  31.92,56.71 0 bottom
Y-  TP  [TP]  33.86,56.74 0 bottom

## Library data of the parts
AIN BT+ BT- BUT_A BUT_B BUT_L BUT_R BUT_X BUT_Y C1-C6 C9-C15 C17 C20-C60 C62-C64 C67 C68 C70 C72-C77 C80 C82-C86 C88 C93-C97 C99-C102 C105-C108 CL2-CL6 CL9 CL11-CL13 CL15 CL17 CL60 CL63-CL65 CL67 CL68 CLKB_MC COM1 COM2 CP1 CP2 CP5 CSB_MC CSB_MC2 D3-D9 DA1 DA3-DA5 DA7 DCLK DL1-DL3 DOWN EM1-EM6 EM10 EM11 EM26 EXTB+ F1 F2 FA1-FA10 GCK GREEN GSP I/00 I/01-I/07 INS+ INS- INT IREQ_MC L1-L6 LEDA1 LEDA2 LEDC1 LEDC2 LEFT LS MICIN MOD ORANGE P00 P01-P09 P.1-P.4 P.6-P.10 P.12 PVDD PWSW Q1-Q6 Q9 Q10 R00 R1-R3 R5 R7 R9-R25 R27-R31 R34-R41 R50 R55 R56 R59-R62 R65 R77-R80 R.01 R.07 RED RESB_MC REV RIGHT RST SELECT SG SL SL1 SPL SPLO SPRO SR START SW SW13 U1 U1GND U1GND2 U2-U4 U6 U8-U11 UP VCNT5 VDD1.2 VDD1.8 VDD3.3 VDD5 VDD10 VDD-5 VDET VGND VIN VR1-VR3 VSHD WB2 X1 X2 X+ X- Y+ Y- = dslparts

## Nets
A16: P.1.22 U1.G17
A17: P.1.23 U1.H17
A18: P.1.24 U1.I17
A19: P.1.25 U1.J17
A20: P.1.26 U1.K17
A21: P.1.27 U1.L17
A22: P.1.28 U1.M17
A23: P.1.29 U1.N17
AD0: P.1.6 U1.G18
AD1: P.1.7 U1.G19
AD2: P.1.8 U1.H18
AD3: P.1.9 U1.H19
AD4: P.1.10 U1.I18
AD5: P.1.11 U1.I19
AD6: P.1.12 U1.J18
AD7: P.1.13 U1.J19
AD8: P.1.14 U1.K18
AD9: P.1.15 U1.K19
AD10: P.1.16 U1.L18
AD11: P.1.17 U1.L19
AD12: P.1.18 U1.M18
AD13: P.1.19 U1.M19
AD14: P.1.20 U1.N18
AD15: P.1.21 U1.N19
AIN: AIN.P$1 C53.2 EM5.1 R11.2
AUX: R78.1 U3.40
B+: C55.1 C56.2 C83.1 CL63.1 CL63.2 L5.P$2 L6.P$2 Q5.1 Q5.2 Q5.5 Q5.6 U3.16 U3.19 U3.23 U3.55 U8.2 VR3.3
B.B0: FA6.1 P.4.22
B.B1: FA7.7 P.4.23
B.B2: FA7.5 P.4.24
B.B3: FA7.3 P.4.25
B.B4: FA7.1 P.4.26
B.B5: FA9.3 P.4.27
B.G0: FA8.7 P.4.15
B.G1: FA6.5 P.4.16
B.G2: FA6.7 P.4.17
B.G3: FA8.5 P.4.19
B.G4: FA9.1 P.4.20
B.G5: FA6.3 P.4.21
B.R0: FA8.3 P.4.9
B.R1: FA8.1 P.4.10
B.R2: FA5.7 P.4.11
B.R3: FA5.3 P.4.12
B.R4: FA5.5 P.4.13
B.R5: FA5.1 P.4.14
BT+: BT+.P$1 F2.1 P.7.+
CLKB_MC: CL5.1 CL5.2 CLKB_MC.P$1 P.2.2 U1.T16
COM1: C15.1 COM1.P$1 P.4.37 VR2.2
COM2: C105.1 COM2.P$1 P.3.37 VR1.2
CS1B: CL4.1 CL4.2 P.1.5 U1.F19
CS2B: CL6.1 CL6.2 P.1.30 U1.O18
CSB_MC: CSB_MC.P$1 P.2.4 U1.S17
CSB_MC2: CSB_MC2.P$1 P.2.6 U1.P17
DCLK: DCLK.P$1 P.3.29 P.4.29 U1.G1
EXTB+: EXTB+.P$1 Q4.3 Q9.3 R28.1 R50.1
GCK: GCK.P$1 P.3.8 P.4.8 U1.H3
GND: BT-.P$1 BUT_A.1 BUT_A.4 BUT_B.1 BUT_B.4 BUT_L.1 BUT_L.3 BUT_L.S1 BUT_L.S2 BUT_R.1 BUT_R.3 BUT_R.S1 BUT_R.S2 BUT_X.1 BUT_X.4 BUT_Y.1 BUT_Y.4 C1.1 C2.2 C3.2 C4.2 C5.2 C6.1 C9.2 C10.2 C11.1 C12.1 C13.2 C14.2 C17.2 C20.2 C21.2 C22.2 C23.2 C24.2 C25.2 C26.2 C27.2 C28.2 C29.2 C30.2 C31.2 C32.2 C33.2 C34.2 C35.2 C36.2 C37.2 C38.2 C39.2 C40.2 C41.1 C42.1 C43.1 C44.1 C45.1 C46.2 C47.2 C48.2 C49.2 C50.2 C51.2 C52.2 C54.2 C55.2 C56.1 C57.2 C58.2 C59.1 C62.2 C63.2 C67.2 C68.2 C72.1 C73.1 C74.1 C75.1 C76.2 C80.2 C82.1 C83.2 C84.1 C85.1 C86.1 C88.2 C93.1 C94.2 C95.1 C96.1 C97.1 C100.1 C101.2 C102.2 C106.1 C107.1 C108.1 CL64.1 CL64.2 CP1.1 CP2.1 CP5.1 D3.A D4.A D5.A D8.A D9.A DA1.2 DA5.2 DL1.C DL2.C DL3.C DOWN.1 DOWN.4 EM6.1 EM10.3 FA1.G1 FA1.G2 FA2.G1 FA2.G2 FA3.G1 FA3.G2 FA4.G1 FA4.G2 FA5.G1 FA5.G2 FA6.G1 FA6.G2 FA7.G1 FA7.G2 FA8.G1 FA8.G2 FA9.G1 FA9.G2 FA10.G1 FA10.G2 LEFT.1 LEFT.4 P.1.32 P.1.S1 P.1.S2 P.2.1 P.2.17 P.2.S1 P.2.S2 P.2.S3 P.2.S4 P.3.4 P.3.18 P.3.28 P.3.33 P.3.36 P.3.S2 P.4.4 P.4.18 P.4.28 P.4.33 P.4.36 P.6.S1 P.6.S2 P.7.- P.7.S1 P.7.S2 P.8.4 P.10.1 P.10.6 P.10.9 P.10.13 P.10.15 P.10.17 P.10.23 P.10.30 P.12.G1 P.12.G2 Q1.2 Q3.2 Q6.2 Q10.1 R13.1 R29.2 R34.2 R35.2 R41.1 R59.2 R60.1 R61.1 R77.2 RIGHT.1 RIGHT.4 SELECT.2 SELECT.3 START.2 START.3 SW13.2 SW13.S1 SW13.S2 U1.A1 U1.A19 U1.D8 U1.D11 U1.D14 U1.E5 U1.E7 U1.E10 U1.E13 U1.F16 U1.G5 U1.G15 U1.I16 U1.J5 U1.J15 U1.L16 U1.M5 U1.M15 U1.O8 U1.O11 U1.O14 U1.O16 U1.O17 U1.P5 U1.P8 U1.P11 U1.P13 U1.R4 U1.R5 U1.R6 U1.S2 U1.S4 U1.S5 U1.T1 U1.T4 U1.T5 U1.T19 U1GND2.P$1 U1GND.P$1 U2.G2 U2.J8 U3.4 U3.13 U3.14 U3.15 U3.22 U3.26 U3.34 U3.41 U3.60 U4.4 U6.6 U6.7 U8.3 U9.2 U10.2 U11.3 UP.1 UP.4 X1.2 X1.4 X2.2 X2.3
GREEN: DL1.A GREEN.P$1 R37.2
GSP: GSP.P$1 P.3.7 P.4.7 U1.H4
I/O0: I/00.P$1 P.2.9 U1.T17
I/O1: I/01.P$1 P.2.10 U1.T18
I/O2: I/02.P$1 P.2.11 U1.S18
I/O3: I/03.P$1 P.2.12 U1.S19
I/O4: I/04.P$1 P.2.13 U1.R18
I/O5: I/05.P$1 P.2.14 U1.R19
I/O6: I/06.P$1 P.2.15 U1.P18
I/O7: I/07.P$1 P.2.16 U1.P19
INS+: INS+.P$1 Q4.2 Q4.P R31.2 U3.7
INS-: D7.A INS-.P$1 R31.1 U3.8
INT: INT.P$1 U1.T10 U4.1
IREQ_MC: IREQ_MC.P$1 P.2.7 U1.R17
IRQ: P.1.31 U1.O19
LEDA1: C82.2 LEDA1.P$1 P.4.38 U9.4
LEDA2: C86.2 LEDA2.P$1 P.3.38 U10.4
LEDC1: LEDC1.P$1 P.4.39 R35.1 U3.33
LEDC2: D9.C LEDC2.P$1 P.3.39 R41.2 U3.35
LS: LS.P$1 P.3.31 P.4.31 U1.H2
MICIN: D8.C MICIN.P$1 P.8.7 P.12.M
MOD: MOD.P$1 P.3.6 P.4.6 U1.I2
N$1: P.8.5 Q1.1 R15.1
N$3: C95.2 U3.36
N$4: C99.2 Q5.3 R56.1
N$5: C70.2 DA3.3
N$6: Q6.1 U11.2
N$7: U1.B15 U2.G1
N$8: C74.2 U3.5
N$9: U1.C14 U2.F1
N$10: C77.2 DA5.3
N$11: C62.1 R18.2
N$12: U1.A14 U2.E1
N$13: EM3.2 P.8.3
N$14: EM4.2 P.8.2
N$15: R9.1 U1.R9 U6.11
N$16: C67.1 R24.1 U3.56
N$17: C68.1 R22.1 U3.59
N$18: U1.B13 U2.D1
N$19: R37.1 U3.43
N$21: U1.C12 U2.F2
N$22: U1.A12 U2.E2
N$23: U1.C11 U2.D2
N$24: U1.B10 U2.C2
N$25: R56.2 U3.11
N$26: U1.A10 U2.C6
N$27: C58.1 R17.1 U3.63
N$28: U1.C9 U2.E6
N$30: C64.1 U3.52
N$31: U1.A8 U2.F6
N$32: FA8.4 U1.D3
N$33: U1.E17 U6.15
N$34: C93.2 U3.50
N$35: U1.T9 U4.7
N$36: C42.2 DA1.1 DA7.1 EM1.6 U6.3
N$37: U1.C8 U2.C7
N$38: U1.B7 U2.D7
N$39: R80.1 U1.E18
N$40: U4.2 X2.1
N$41: C106.2 R78.2 U6.8
N$42: C43.2 DA1.3 DA7.3 EM1.4 U6.4
N$43: C44.2 DA1.4 DA7.4 EM1.2 U6.5
N$44: U1.S10 U4.6
N$45: C41.2 DA1.5 DA7.5 EM1.8 U6.2
N$46: U1.R10 U4.5
N$47: C12.2 U4.3 X2.4
N$48: R1.1 R2.2 U1.S12
N$49: C1.2 R1.2 U1.T12 X1.3
N$50: P.10.29 U1.P1
N$51: C2.1 R2.1 X1.1
N$52: P.10.21 U1.P2
N$54: P.10.19 U1.R1
N$55: P.10.2 U1.O2
N$56: P.10.3 U1.N3
N$57: P.10.4 U1.N4
N$58: P.10.5 U1.N2
N$59: P.10.7 U1.N1
N$60: U1.A6 U2.E7
N$61: P.10.8 U1.O1
N$62: U1.A5 U2.F7
N$63: P.10.20 U1.L2
N$64: U1.A4 U2.D8
N$65: U1.C5 U2.G8
N$66: U1.A3 U2.F3
N$68: U1.B4 U2.E3
N$69: U1.B3 U2.D6
N$70: C63.1 R21.1 U3.53
N$71: U1.C4 U2.E5
N$72: U1.C3 U2.E8
N$73: U1.A15 U2.J2
N$74: EM10.2 F1.1
N$75: Q2.3 Q9.1 R29.1
N$76: C52.1 R10.1 U3.38
N$77: U1.B14 U2.G3
N$78: U1.A13 U2.K3
N$79: P.10.10 U1.M4
N$80: C70.1 C77.1 DA4.1 L4.2 Q3.3
N$81: FA8.2 U1.D4
N$82: P.10.11 U1.M2
N$83: P.10.18 U1.M1
N$84: U1.C13 U2.H4
N$85: P.10.12 U1.L3
N$86: C73.2 R50.2 U3.2
N$87: P.10.14 U1.M3
N$88: EM11.2 U1.T7
N$89: FA5.8 U1.A2
N$90: U1.B12 U2.H5
N$91: FA5.4 U1.B1
N$92: FA5.6 U1.B2
N$93: FA5.2 U1.C2
N$94: U1.B11 U2.K6
N$95: FA8.8 U1.E3
N$96: FA6.6 U1.D2
N$97: U1.A11 U2.G6
N$98: FA6.8 U1.C1
N$99: FA8.6 U1.E4
N$100: FA9.2 U1.F3
N$101: R39.1 U3.3
N$102: U1.C10 U2.J7
N$103: FA6.4 U1.D1
N$104: C54.1 R10.2 R11.1
N$105: U1.B9 U2.K2
N$106: Q3.1 U3.29
N$107: C53.1 U3.39
N$108: U1.A9 U2.H3
N$109: U1.B8 U2.J3
N$110: U1.A7 U2.K4
N$111: C64.2 R20.1 R21.2
N$112: U1.C7 U2.J6
N$113: FA6.2 U1.E2
N$114: FA7.8 U1.E1
N$115: FA7.6 U1.F2
N$116: FA7.4 U1.F1
N$117: FA7.2 U1.G2
N$118: FA9.4 U1.G3
N$119: FA1.8 U1.I1
N$120: FA1.6 U1.I3
N$121: FA3.2 U1.I4
N$122: R13.2 VR3.1
N$123: U1.B6 U2.H6
N$124: U1.C6 U2.K7
N$125: D5.C Q2.1
N$126: EM10.1 Q2.2 Q9.2
N$127: Q4.1 R28.2 R30.2
N$128: U1.B5 U2.H7
N$129: FA1.2 U1.J2
N$130: U1.B18 U2.J1
N$131: C59.2 R79.1 U3.61
N$132: FA1.4 U1.J1
N$133: U1.B17 U2.D5
N$134: U1.A18 U2.H2
N$135: U1.B16 U2.C5
N$136: U1.A17 U2.C3
N$137: U1.A16 U2.D3
N$138: FA3.4 U1.J3
N$139: FA3.6 U1.J4
N$140: FA2.2 U1.K4
N$141: FA2.8 U1.K1
N$142: FA2.6 U1.K2
N$143: U1.C15 U2.D4
N$144: EM26.1 U1.C16
N$145: EM26.2 R65.1
N$146: R65.2 U2.C4
N$147: FA3.8 U1.K3
N$148: FA4.2 U1.L4
N$149: FA2.4 U1.L1
N$150: R7.1 VR2.1
N$151: FA4.4 U1.O3
N$152: FA4.6 U1.O4
N$153: FA10.6 U1.R2
N$154: FA10.8 U1.S1
N$155: FA4.8 U1.P4
N$156: C15.2 P.4.34
N$157: R61.2 VR2.3
N$158: R3.1 VR1.1
N$159: C105.2 P.3.34
N$160: R60.2 VR1.3
N$161: R19.1 R20.2 U3.54
N$162: CL67.1 CL67.2 R19.2 U1.D16
N$163: C60.2 R16.1 R17.2
N$164: C60.1 U3.62
N$165: R14.1 R16.2 U3.64
N$166: CL68.1 CL68.2 R14.2 U1.D17
N$167: R79.2 VR3.2
N$168: U3.31 U9.1
N$169: U3.37 U10.1
N$170: L5.P$1 U9.3 U9.5
N$171: R38.1 U3.42
N$172: L6.P$1 U10.3 U10.5
N$173: EM6.2 P.8.8
N$174: EM5.2 P.8.6
N$175: R30.1 U3.6
N$176: C80.1 DA5.1 Q10.2 R59.1
N$177: DA3.1 DA4.2 R27.1 R62.1 U3.30
N$178: C76.1 R27.2
N$179: L3.P$2 U8.4 U8.5
N$180: CP2.2 CP5.2 R23.1
N$181: U3.24 U8.1
N$182: D4.C L2.2 U3.20
N$183: C57.1 R12.2
N$185: D3.C L1.P$2 U3.17
ORANGE: DL3.A ORANGE.P$1 R39.2
P00: BUT_A.2 BUT_A.3 P00.P$1 U1.S16
P01: BUT_B.2 BUT_B.3 P01.P$1 U1.R15
P02: P02.P$1 SELECT.1 SELECT.4 U1.S15
P03: P03.P$1 START.1 START.4 U1.T15
P04: P04.P$1 RIGHT.2 RIGHT.3 U1.R14
P05: LEFT.2 LEFT.3 P05.P$1 U1.S14
P06: P06.P$1 U1.T14 UP.2 UP.3
P07: DOWN.2 DOWN.3 P07.P$1 U1.R13
P08: BUT_R.2 P08.P$1 U1.S13
P09: BUT_L.2 P09.P$1 U1.T13
PHI: P.1.2 R80.2
PHONES.GND: EM2.2 P.8.1
PVDD: C10.1 C85.2 D6.C PVDD.P$1 R36.1 R55.1 U3.10 U4.8
PWSW: C108.2 PWSW.P$1 R36.2 SW13.1 U3.12
R00: BUT_X.2 BUT_X.3 R00.P$1 U1.S7
R.01: BUT_Y.2 BUT_Y.3 R.01.P$1 U1.R7
R.07: Q6.3 R5.1 R.07.P$1 U1.B19 U1.S9
RDB: CL3.1 CL3.2 P.1.4 U1.F18
RED: DL2.A R38.2 RED.P$1
RESB_MC: P.2.5 RESB_MC.P$1 U1.R16
REV: CL65.1 CL65.2 P.3.35 P.4.35 REV.P$1 U1.H1
RST: EM11.1 P.10.22 R40.1 RST.P$1 U3.51
SG: CP1.2 EM2.1 P.3.42 P.3.43 SG.P$1
SL: EM4.1 R22.2 SL.P$1
SPI_C1: U1.C18 U3.48
SPI_C2: P.10.28 U1.D18
SPI_MISO: P.10.26 U1.D19 U3.47 U6.12
SPI_MOSI: P.10.25 U1.F17 U3.46 U6.14
SPI_SK: CL9.1 CL9.2 P.10.24 U1.C19 U3.45 U6.16
SPL: P.3.30 P.4.30 SPL.P$1 U1.G4
SPLO: C102.1 P.3.44 P.3.45 SPLO.P$1 U3.58
SPRO: C101.1 P.3.40 P.3.41 SPRO.P$1 U3.57
SR: EM3.1 R24.2 SR.P$1
SW: Q1.3 SW.P$1 U3.1
T.B0: FA2.3 P.3.22
T.B1: FA4.3 P.3.23
T.B2: FA4.5 P.3.24
T.B3: FA10.5 P.3.25
T.B4: FA10.7 P.3.26
T.B5: FA4.7 P.3.27
T.G0: FA3.5 P.3.15
T.G1: FA2.1 P.3.16
T.G2: FA2.7 P.3.17
T.G3: FA2.5 P.3.19
T.G4: FA3.7 P.3.20
T.G5: FA4.1 P.3.21
T.R0: FA1.7 P.3.9
T.R1: FA1.5 P.3.10
T.R2: FA3.1 P.3.11
T.R3: FA1.1 P.3.12
T.R4: FA1.3 P.3.13
T.R5: FA3.3 P.3.14
VCNT5: U1.C17 U3.49 VCNT5.P$1
VDD1.2: C17.1 C20.1 C21.1 C22.1 C23.1 C24.1 C25.1 C26.1 C27.1 C28.1 C29.1 C30.1 CL11.1 CL11.2 L1.P$1 R12.1 U1.E6 U1.E8 U1.E9 U1.E11 U1.E12 U1.E14 U1.E15 U1.F5 U1.F15 U1.H5 U1.H15 U1.I15 U1.K5 U1.K15 U1.L15 U1.N15 U1.O6 U1.O9 U1.O10 U1.O12 U1.O13 U1.O15 U1.P12 U3.18 VDD1.2.P$1
VDD1.8: C11.2 C31.1 C32.1 C33.1 C34.1 CL12.1 CL12.2 L2.1 R18.1 U1.D7 U1.D9 U1.D10 U1.D12 U1.D13 U1.D15 U2.J4 U2.J5 U3.21 VDD1.8.P$1
VDD3.3: C3.1 C5.1 C9.1 C35.1 C36.1 C37.1 C38.1 C39.1 C40.1 C45.2 C46.1 C47.1 C48.1 C49.1 C50.1 C51.1 C84.2 C88.1 C100.2 CL13.1 CL13.2 CL60.1 CL60.2 DA7.2 L3.P$1 P.1.1 P.2.8 P.10.16 R5.2 R9.2 R15.2 R23.2 R40.2 R77.1 SL1.P$2 U1.D5 U1.D6 U1.E16 U1.F4 U1.G16 U1.H16 U1.I5 U1.J16 U1.K16 U1.L5 U1.M16 U1.N5 U1.N16 U1.O5 U1.O7 U1.P3 U1.P9 U1.P10 U1.P14 U1.P15 U1.P16 U1.S3 U1.T2 U3.25 U3.27 U3.44 U6.1 U6.9 U6.10 U11.1 VDD3.3.P$1
VDD5: C6.2 C14.1 C94.1 P.3.3 P.4.3 R3.2 R7.2 R62.2 VDD5.P$1
VDD10: C72.2 CL15.1 CL15.2 DA3.2 P.3.2 P.4.2 R25.1 VDD10.P$1
VDD-5: CL17.1 CL17.2 P.3.1 P.4.1 Q10.3 R25.2 R34.1 VDD-5.P$1
VDET: C96.2 C99.1 C107.2 D6.A D7.C F2.2 Q5.4 R55.2 U3.9 VDET.P$1
VGND: EM10.4 P.9.- P.9.S1 P.9.S2 P.9.S3 P.9.S4 VGND.P$1
VIN: F1.2 P.9.+ VIN.P$1
VSHD: C4.1 C13.1 C75.2 L4.1 P.3.5 P.3.32 P.4.5 P.4.32 U3.28 VSHD.P$1
WB2: C97.2 P.10.27 SL1.P$1 WB2.P$1
WRB: CL2.1 CL2.2 P.1.3 U1.E19
X+: EM1.7 P.6.3 X+.P$1
X-: EM1.3 P.6.1 X-.P$1
Y+: EM1.5 P.6.4 Y+.P$1
Y-: EM1.1 P.6.2 Y-.P$1

## Tracks (layer width: path | path; a pad name or v marks a point on that pad's centre or on a via)
A16  (via drill 0.2)
  T3 0.152: v57.36,41.24 56.97,41.62 U1.G17
  T3 0.635: v51.01,27.9 51.39,27.53 P.1.22
  B1 0.152: v51.01,27.9 49.87,29.05 49.87,34.46 55.26,39.85 56.33,39.85 57.36,40.88 v57.36,41.24
A17  (via drill 0.2)
  T3 0.152: v56.55,41.25 56.17,41.62 U1.H17
  T3 0.635: v49.74,27.9 49.89,27.76 P.1.23
  B1 0.152: v49.74,27.9 49.52,28.13 49.52,34.58 55.2,40.27 56,40.27 56.55,40.82 v56.55,41.25
A18  (via drill 0.2)
  T3 0.152: v55.71,41.23 U1.I17
  T3 0.635: v48.47,27.9 48.39,27.82 P.1.24
  B1 0.152: v48.47,27.9 49.19,28.62 49.19,34.73 55.69,41.23 v55.71,41.23
A19  (via drill 0.2)
  T3 0.152: v54.11,41.24 54.49,41.62 U1.J17
  T3 0.635: v47.21,27.91 46.89,27.59 P.1.25
  B1 0.152: v47.21,27.91 48.85,29.55 48.85,34.85 54.11,40.1 v54.11,41.24
A20  (via drill 0.2)
  T3 0.152: v53.34,41.24 U1.K17
  T3 0.635: v45.06,27.91 45.39,27.58 P.1.26
  B1 0.152: v45.06,27.91 45.06,28.39 46.96,30.29 46.96,34.82 53.34,41.2 v53.34,41.24
A21  (via drill 0.2)
  T3 0.152: v52.54,41.23 U1.L17
  T3 0.635: v43.77,27.9 43.89,27.79 P.1.27
  B1 0.152: v43.77,27.9 46.63,30.76 46.63,35.06 52.54,40.97 v52.54,41.23
A22  (via drill 0.2)
  T3 0.152: v51.73,41.24 52.11,41.62 U1.M17
  T3 0.635: v42.47,27.9 42.39,27.82 P.1.28
  B1 0.152: v42.47,27.9 43.7,29.13 44.27,29.13 46.31,31.17 46.31,35.23 51.73,40.65 v51.73,41.24
A23  (via drill 0.2)
  T3 0.152: v50.92,41.25 51.3,41.62 U1.N17
  T3 0.635: v41.16,27.91 40.89,27.64 P.1.29
  B1 0.152: v41.16,27.91 44.78,31.54 44.78,34.49 50.92,40.63 v50.92,41.25
AD0  (via drill 0.2)
  T3 0.152: v59.65,36.13 59.65,36.56 57.32,38.88 57.32,40.42 U1.G18
  T3 0.635: v75.11,27.92 75.39,27.65 P.1.6
  B1 0.152: v59.65,36.13 60.62,35.16 63.49,35.16 64.43,34.22 64.43,33.38 65.2,32.61 69.85,32.61 73.78,28.67 74.36,28.67 v75.11,27.92
AD1  (via drill 0.2)
  T3 0.152: v59.3,35.16 58.95,35.51 58.95,36.76 56.92,38.79 U1.G19
  T3 0.635: v73.83,27.91 73.89,27.85 P.1.7
  B1 0.152: v73.83,27.91 69.42,32.31 65,32.31 64.06,33.26 64.06,33.99 63.23,34.82 59.64,34.82 v59.3,35.16
AD2  (via drill 0.2)
  T3 0.152: v58.37,36.15 58.37,36.85 56.51,38.71 56.51,40.43 U1.H18
  T3 0.635: v72.61,27.92 72.39,27.7 P.1.8
  B1 0.152: v72.61,27.92 68.54,31.99 64.78,31.99 63.77,33 63.77,33.74 62.98,34.53 59.05,34.53 58.37,35.21 v58.37,36.15
AD3  (via drill 0.2)
  T3 0.152: v57.99,35.19 57.68,35.5 57.68,37.01 56.12,38.57 U1.H19
  T3 0.635: v71.33,27.91 70.89,27.47 P.1.9
  B1 0.152: v71.33,27.91 67.59,31.65 64.55,31.65 63.46,32.74 63.46,33.5 62.75,34.2 58.61,34.2 57.99,34.82 v57.99,35.19
AD4  (via drill 0.2)
  T3 0.152: v56.37,36.17 56.37,37.85 55.74,38.48 55.74,40.41 U1.I18
  T3 0.635: v69.06,27.93 69.39,27.6 P.1.10
  B1 0.152: v69.06,27.93 65.97,31.01 57.82,31.01 57.25,31.58 57.25,35.29 v56.37,36.17
AD5  (via drill 0.2)
  T3 0.152: v56.1,35.18 55.76,35.52 55.76,37.9 55.32,38.34 U1.I19
  T3 0.635: v67.83,27.9 67.83,25.91 P.1.11
  B1 0.152: v67.83,27.9 65.02,30.72 57.61,30.72 56.79,31.54 56.79,34.34 56.1,35.03 v56.1,35.18
AD6  (via drill 0.2)
  T3 0.152: v55.11,36.15 55.11,38.02 54.94,38.19 54.94,40.4 U1.J18
  T3 0.635: v66.59,27.93 66.39,27.73 P.1.12
  B1 0.152: v66.59,27.93 64.12,30.39 57.49,30.39 55.59,32.3 55.59,35.68 v55.11,36.15
AD7  (via drill 0.2)
  T3 0.152: v54.81,35.13 54.52,35.42 U1.J19
  T3 0.635: v65.32,27.9 64.89,27.46 P.1.13
  B1 0.152: v65.32,27.9 63.12,30.1 57.34,30.1 54.19,33.26 54.19,34.51 v54.81,35.13
AD8
  T3 0.152: 62.69,27.73 61.89,28.53 60.29,28.53 58.75,30.07 50.11,30.07 49.78,30.4 49.78,33.94 54.11,38.27 54.11,40.43 U1.K18
  T3 0.635: P.1.14 63.39,27.03 62.69,27.73
AD9
  T3 0.152: 61.4,27.64 60.88,28.17 60.13,28.17 58.52,29.79 49.85,29.79 49.42,30.21 49.42,34.06 53.72,38.35 U1.K19
  T3 0.635: P.1.15 61.89,27.16 61.4,27.64
AD10
  T3 0.152: 60.35,27.49 58.38,29.46 49.7,29.46 49.1,30.06 49.1,34.19 53.31,38.4 53.31,40.43 U1.L18
  T3 0.635: P.1.16 60.39,27.45 60.35,27.49
AD11
  T3 0.152: 58.89,27.96 57.69,29.16 49.57,29.16 48.8,29.93 48.8,34.36 52.92,38.48 U1.L19
  T3 0.635: P.1.17 58.89,27.96
AD12
  T3 0.152: 57.39,27.97 56.49,28.86 49.4,28.86 48.48,29.77 48.48,34.56 52.51,38.58 52.51,40.43 U1.M18
  T3 0.635: P.1.18 57.39,27.97
AD13
  T3 0.152: 55.89,27.77 55.07,28.59 49.17,28.59 48.15,29.6 48.15,34.69 52.12,38.65 U1.M19
  T3 0.635: P.1.19 55.89,27.77 55.92,27.8
AD14  (via drill 0.2)
  T3 0.152: v47.54,33.62 47.87,33.94 47.87,34.87 51.71,38.71 51.71,40.43 U1.N18
  T3 0.635: P.1.20 54.39,27.75 v54.23,27.9
  B1 0.152: v47.54,33.62 48.23,32.93 48.23,30.04 46.44,28.25 46.44,27.43 46.92,26.95 51.05,26.95 52.66,28.56 53.52,28.56 54.18,27.9 v54.23,27.9
AD15  (via drill 0.2)
  T3 0.152: v47.58,32.34 46.94,32.98 46.94,34.43 51.32,38.81 U1.N19
  T3 0.635: P.1.21 52.89,27.83 v52.96,27.9
  B1 0.152: v47.58,32.34 47.58,30.02 46.07,28.51 46.07,27.19 46.61,26.64 51.7,26.64 v52.96,27.9
AIN  (via drill 0.2)
  T3 0.152: R11.2 25.1,14.87 25.11,14.86 | 25.11,14.86 25.46,14.86 26.03,15.43 26.03,19.39 25.67,19.75 25.67,22.18 23.81,24.04 20.98,24.04 19.18,25.83 19.18,26.67 18.94,26.91 18.74,27.11 v18.74,27.21 18.4,27.55 C53.2 | EM5.1 25.14,14.83 25.11,14.86
  B3 0.254: v18.74,27.21 17.71,27.21 AIN.P$1
AUX  (via drill 0.2)
  T3 0.152: R78.1 25.05,43.05 25.34,42.77 26.53,42.77 27.13,43.37 30.66,43.37 31.64,44.34 32.66,44.34 v33.26,43.74 | U3.40 18.82,30.91 18.98,30.75 18.98,28.03 19.54,27.47 19.54,25.99 21.16,24.37 26.55,24.37 27.49,25.31 31.53,25.31 33.89,27.66 33.89,28.89 34.82,29.82 36.8,29.82 v37.13,29.49
  B1 0.152: v37.13,29.49 37.13,31.08 35.89,33.53 35.89,37.02 37.16,38.29 37.16,40.87 35.9,42.13 34.87,42.13 v33.26,43.74
B+  (via drill 0.2)
  T3 0.152: v15.23,40.89 15.7,40.89 16.02,40.57 U3.16 | U3.19 13.99,37.98 v12.98,38.99 | U3.23 13.29,36.38 v13,36.1 | U3.55 24.08,35.18 24.75,34.51 v25.22,34.51
  T3 0.254: C55.1 12,35.09 v13,36.1
  T3 0.381: C55.1 10.86,35.09 9.49,33.72 U8.2 8.44,33.72 v7.85,33.13
  T3 0.508: VR3.3 99.76,2.89 99.31,2.44 95.74,2.44 95.42,2.77 93.77,2.77 91.94,4.6 91.94,6.52 92.69,7.28 92.69,12.69 91.9,13.47 91.9,23.42 90.3,25.03 v89.7,25.03 v88.43,25.03
  T3 0.762: L5.P$2 L6.P$2 22.25,17.45 | v23.77,21.89 23.77,18.27 22.95,17.45 22.25,17.45 | 22.25,17.45 22.28,17.47 C83.1
  T1 0.889: v88.43,25.03 v89.7,25.03
  B3 0.152: v25.22,34.51 24.29,34.51 22.77,32.99 CL63.2 CL63.1
  B3 0.381: v88.43,25.03 v89.7,25.03 | 22.67,30.31 22.43,30.38 21.6,30.38 21.52,30.46 | 22.67,30.31 23.5,30.07 24.67,29.19 25.25,28.45 25.37,26.95 25.35,25.91 24.91,25.14 23.9,24.17 23.77,24.04 v23.77,21.89 | CL63.1 22.77,30.41 22.67,30.31 | 21.52,30.46 | 21.52,30.46 C56.2
  other vias: 10.8,24.23 11.08,25.67
  pour T1 (isolate 0.381): 5.64,24 5.64,35.31 6.13,35.8 11.99,39.62 12.12,39.75 12.5,39.75 12.88,39.37 13.26,39.37 13.77,39.88 13.77,40.64 14.53,41.4 15.16,41.4 15.54,41.02 15.54,37.21 12.12,30.48 12.12,29.46 11.86,29.21 11.35,29.21 10.97,28.83 10.97,28.19 11.23,27.94 11.99,27.94 11.99,24.89 10.72,23.62 6.02,23.62
  pour T3: 83.86,26.67 89.06,26.67 90.59,25.15 90.59,24.77 90.59,24.64 90.21,24.64 89.57,24.64 83.86,24.64
  pour B3 (isolate 0.152): 10.2,26.42 10.2,23.62 10.96,23.62 11.85,24.51 11.85,25.78 11.85,25.91 11.34,26.42 10.32,26.42
  pour B2 (isolate 0.254): 90.33,25.65 69.38,25.65 13.25,25.65 12.1,26.8 9.94,26.8 9.94,18.67 10.07,18.54 29.88,18.54 30.01,18.67 30.01,19.94 arc-90 28.61,21.34 28.61,21.97 arc-90 30.01,23.37 30.14,23.37 89.83,23.37 89.95,23.37 90.33,22.99 90.46,23.11 90.46,23.75 90.46,25.65
B.B0  (via drill 0.2)
  T3 0.152: v115.69,12.69 114.09,12.69 113.46,12.06 110.54,12.06 v110.26,12.35 | v75.73,62.11 75.32,62.52 75.32,63.76 74.69,64.39 74.69,65 73.42,66.28 68.3,66.28 63.8,61.78 62.75,61.78 61.46,60.48 FA6.1
  B3 0.152: P.4.22 115.86,12.87 v115.69,12.69 | v110.26,12.35 109.93,12.67 109.93,14.12 106.98,17.07 106.98,17.78 94.44,30.32 94.44,48.17 90.6,52.01 87.74,52.01 87.12,51.39 84.34,51.39 76.02,59.71 76.02,61.71 75.73,62 v75.73,62.11
B.B1  (via drill 0.2)
  T3 0.152: v76.08,63.09 75.74,63.43 75.74,63.85 75.11,64.47 75.11,65.02 73.54,66.59 68.15,66.59 63.66,62.1 61.42,62.1 59.56,60.25 FA7.7
  B3 0.152: P.4.23 112.77,13.17 112.28,12.68 112.28,12.45 111.91,12.08 111.09,12.08 110.89,12.28 110.89,12.69 110.25,13.33 110.25,14.26 107.32,17.19 107.32,17.93 94.76,30.5 94.76,48.33 90.81,52.28 87.55,52.28 86.96,51.69 84.53,51.69 76.35,59.88 76.35,62.45 76.37,62.46 76.37,62.8 v76.08,63.09
B.B2  (via drill 0.2)
  T3 0.152: v118.56,13.29 112.16,13.29 v111.53,12.65 | v76.98,61.21 76.72,61.46 76.72,63.4 75.45,64.67 75.45,65.17 73.72,66.9 67.96,66.9 63.48,62.42 61.3,62.42 59.08,60.2 FA7.5
  B3 0.152: P.4.24 118.39,13.47 v118.56,13.29 | v111.53,12.65 110.61,13.57 110.61,14.38 107.67,17.32 107.67,18.12 95.07,30.72 95.07,48.5 90.98,52.58 87.39,52.58 86.8,51.99 84.73,51.99 77.22,59.5 77.22,60.52 76.93,60.8 76.93,61.17 v76.98,61.21
B.B3  (via drill 0.2)
  T3 0.152: v77.3,62.16 77.05,62.42 77.05,63.47 75.77,64.75 75.77,65.33 73.9,67.2 67.79,67.2 63.32,62.73 61.17,62.73 58.61,60.17 58.61,60.08 58.6,60.07 FA7.3
  B3 0.152: P.4.25 112.63,13.77 112.23,13.37 111.33,13.37 110.88,13.81 110.88,14.6 107.99,17.49 107.99,18.24 102.28,23.96 102.27,23.96 95.38,30.85 95.38,48.68 91.12,52.93 87.24,52.93 86.6,52.29 84.88,52.29 77.6,59.56 77.6,61.66 77.45,61.81 77.45,62.01 v77.3,62.16
B.B4  (via drill 0.2)
  T3 0.152: v115.67,13.98 111.89,13.98 v111.84,13.93 | v77.63,63.13 77.63,63.35 76.08,64.9 76.08,65.5 74.07,67.51 67.67,67.51 63.25,63.08 61.04,63.08 58.12,60.16 58.12,60.08 58.11,60.08 FA7.1
  B3 0.152: P.4.26 115.76,14.07 v115.67,13.98 | v111.84,13.93 111.84,14.08 108.28,17.64 108.28,18.45 95.72,31.02 95.72,48.81 91.31,53.21 87.05,53.21 86.42,52.58 85.06,52.58 77.94,59.7 77.94,62.52 77.81,62.65 77.81,62.96 v77.63,63.13
B.B5
  B3 0.152: P.4.27 112.17,14.37 111.87,14.66 111.74,14.66 109.41,17 109.4,17 108.59,17.81 108.59,18.62 97.24,29.97 97.23,29.97 96.02,31.18 96.02,48.98 91.46,53.55 86.93,53.55 86.29,52.91 85.2,52.91 79.19,58.92 79.19,63.1 78.56,63.72 75.38,63.72 74.79,64.31 74.79,65.35 73.53,66.6 68.1,66.6 66.2,64.7 65.45,64.7 65.13,64.37 FA9.3
B.G0
  B3 0.152: P.4.15 107.41,10.77 106.74,11.44 106.74,13.95 104.67,16.02 104.67,16.72 103.73,17.66 102.44,17.66 98.71,21.39 98.69,21.39 92.25,27.82 92.25,45.83 88.93,49.15 83.28,49.15 72.55,59.88 72.55,63.7 72.88,64.03 73.79,64.03 74.08,64.32 74.08,64.91 73.07,65.92 68.35,65.92 67.39,64.95 FA8.7
B.G1  (via drill 0.2)
  T3 0.152: v107.39,11.7 107.7,11.39 v115.36,11.39 | v73.18,63.44 72.95,63.67 72.95,65.19 72.48,65.66 68.69,65.66 64.22,61.19 63.27,61.19 62.42,60.33 FA6.5
  B3 0.152: P.4.16 115.68,11.07 v115.36,11.39 | v107.39,11.7 107.1,11.99 107.1,14.04 104.96,16.18 104.96,16.93 103.93,17.96 102.6,17.96 92.55,28.02 92.55,30 92.56,30.01 92.56,33.18 92.54,33.2 92.54,46.08 89.17,49.44 83.46,49.44 72.87,60.03 72.87,62.85 73.18,63.16 v73.18,63.44
B.G2  (via drill 0.2)
  T3 0.152: v73.5,62.46 73.04,62.46 72.63,62.87 72.63,64.79 72.11,65.31 68.84,65.31 64.35,60.82 63.48,60.82 62.89,60.23 FA6.7
  B3 0.152: P.4.17 112.55,11.37 112.28,11.1 108.32,11.1 107.93,11.49 107.93,12.13 107.38,12.68 107.38,14.21 105.32,16.27 105.32,17.08 104.15,18.24 102.76,18.24 92.86,28.14 92.86,46.23 89.36,49.74 83.6,49.74 73.21,60.13 73.21,61.9 73.5,62.19 v73.5,62.46
B.G3  (via drill 0.2)
  T1 0.152: v73.55,64.74 74.28,64.02 74.28,61.92 v73.87,61.51
  B3 0.152: P.4.19 112.72,11.97 112.18,11.42 108.71,11.42 108.24,11.89 108.24,12.3 107.7,12.84 107.7,14.37 105.63,16.45 105.63,17.2 104.27,18.56 102.89,18.56 93.18,28.27 93.18,46.36 89.45,50.09 83.72,50.09 74.1,59.71 74.1,60.84 73.87,61.07 v73.87,61.51 | v73.55,64.74 72.72,65.57 68.46,65.57 67.87,64.98 FA8.5
B.G4  (via drill 0.2)
  T3 0.152: v118.2,12.31 117.88,11.99 114.12,11.99 113.84,11.71 109.32,11.71 v109,12.04
  B3 0.152: P.4.20 118.16,12.27 v118.2,12.31 | v109,12.04 108.05,12.98 108.05,14.49 105.93,16.61 105.93,17.36 104.41,18.88 103.05,18.88 93.49,28.44 93.49,46.57 91.73,48.34 91.7,48.34 89.62,50.42 83.84,50.42 74.45,59.8 74.45,62.15 74.16,62.44 74.16,63.73 74.47,64.04 74.47,65.17 73.41,66.23 68.18,66.23 66.35,64.39 65.88,64.39 65.61,64.13 FA9.1
B.G5  (via drill 0.2)